# Altium PCB NC1-1B-BASIS.PcbDoc (part 1 of 4)
Units mm, origin at the board's own origin, x right, y up, seen from the top; angles counter-clockwise.
Board outline 78 x 78 mm, 4 copper layers (Top Layer, Mid 1 (GND), Mid 2 (PWR), Bottom Layer), stack 1.586 mm thick; 290 components, 134 nets, 819 pads, 380 vias.
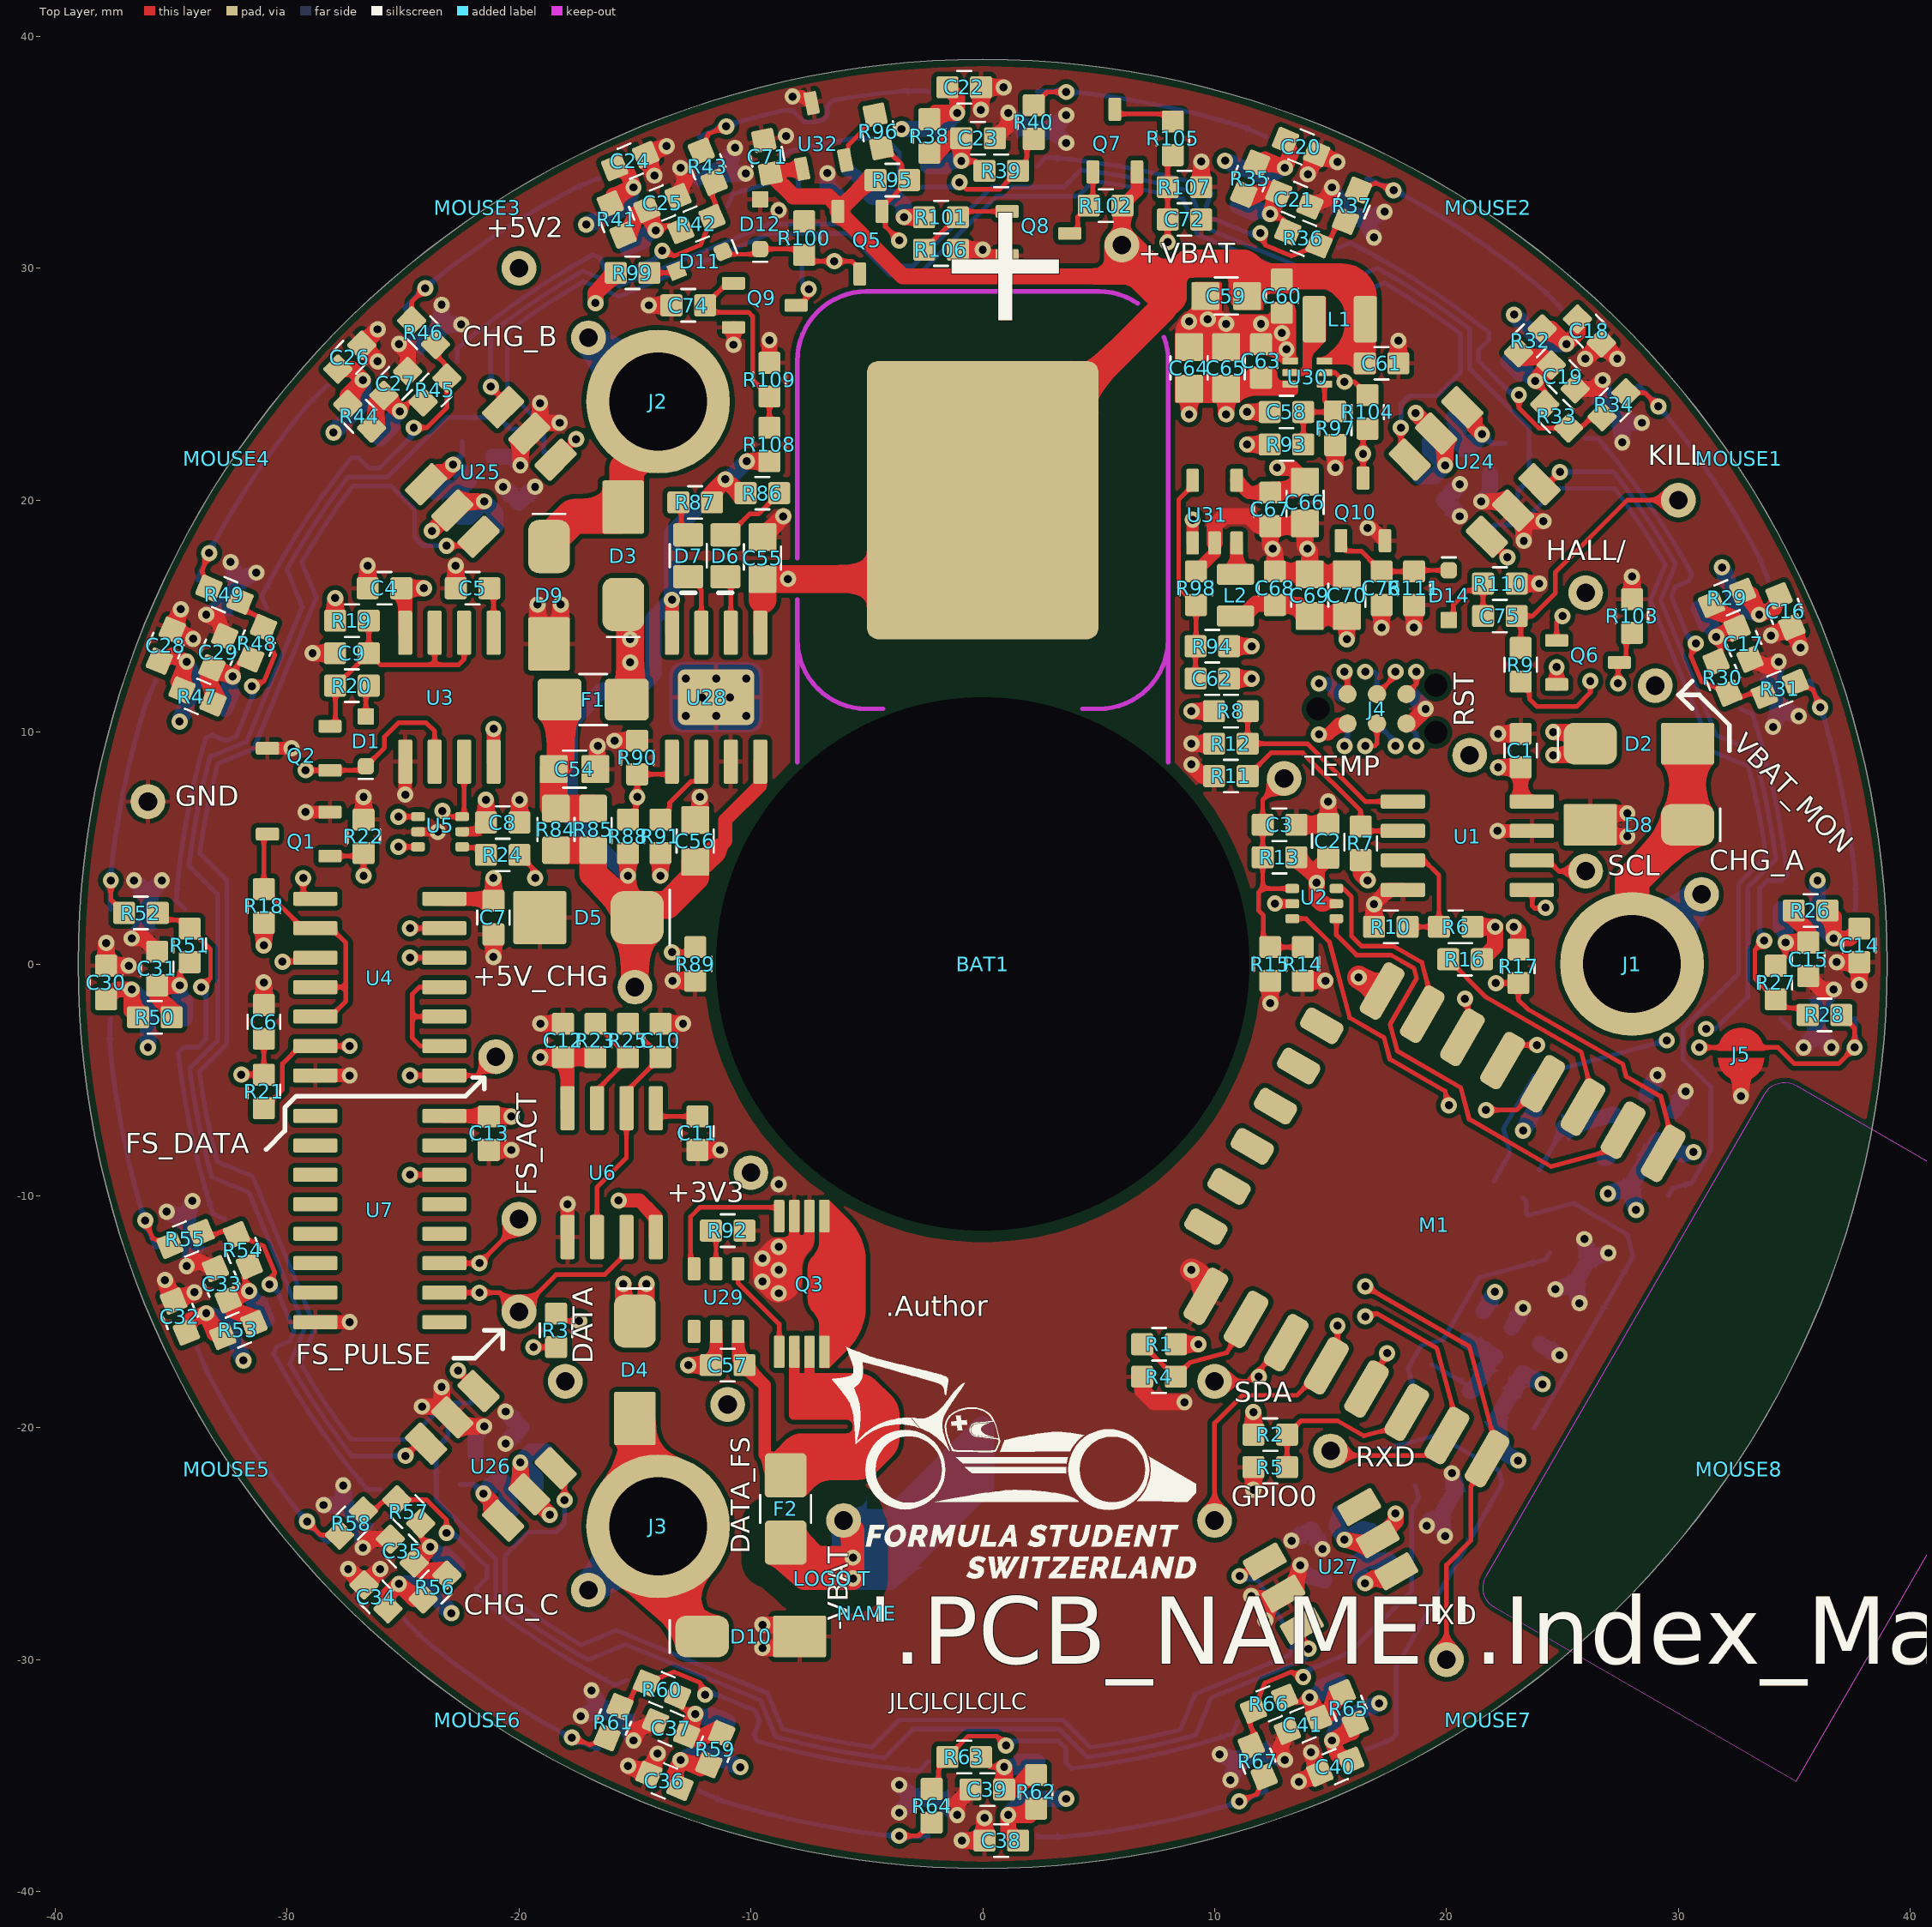
[diagram p0: Top Layer view]
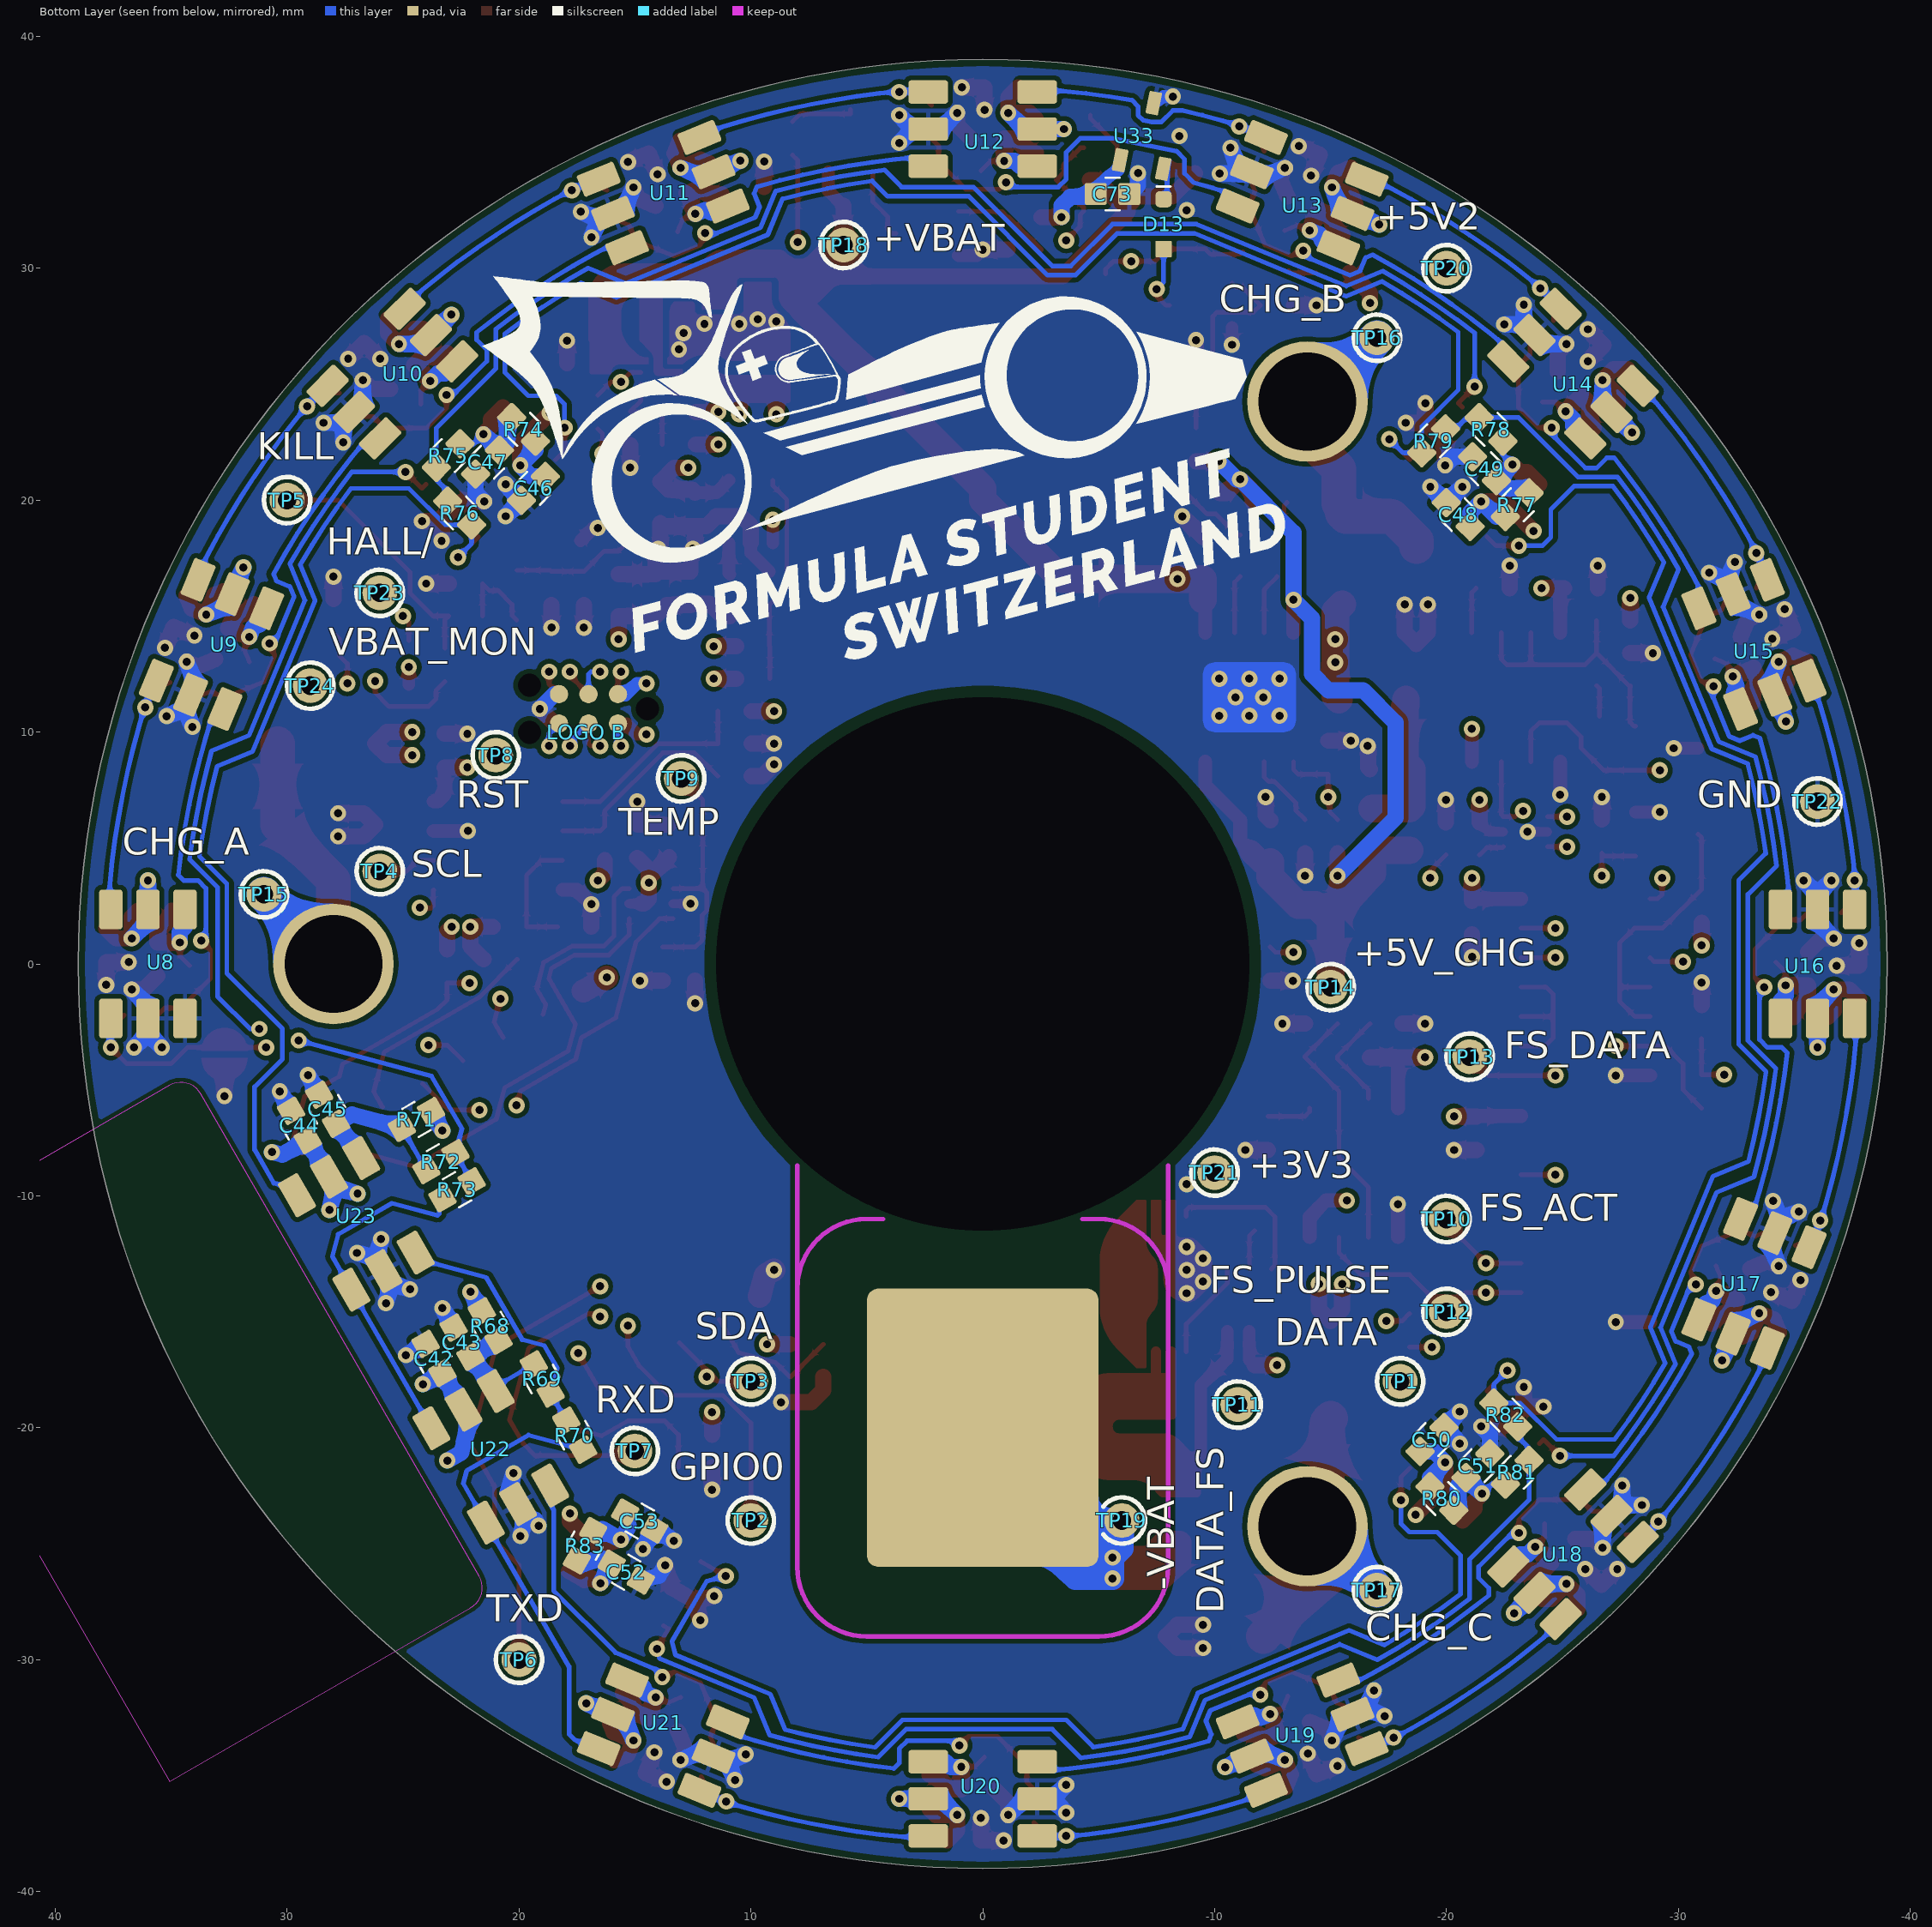
[diagram p1: Bottom Layer view, seen from below]
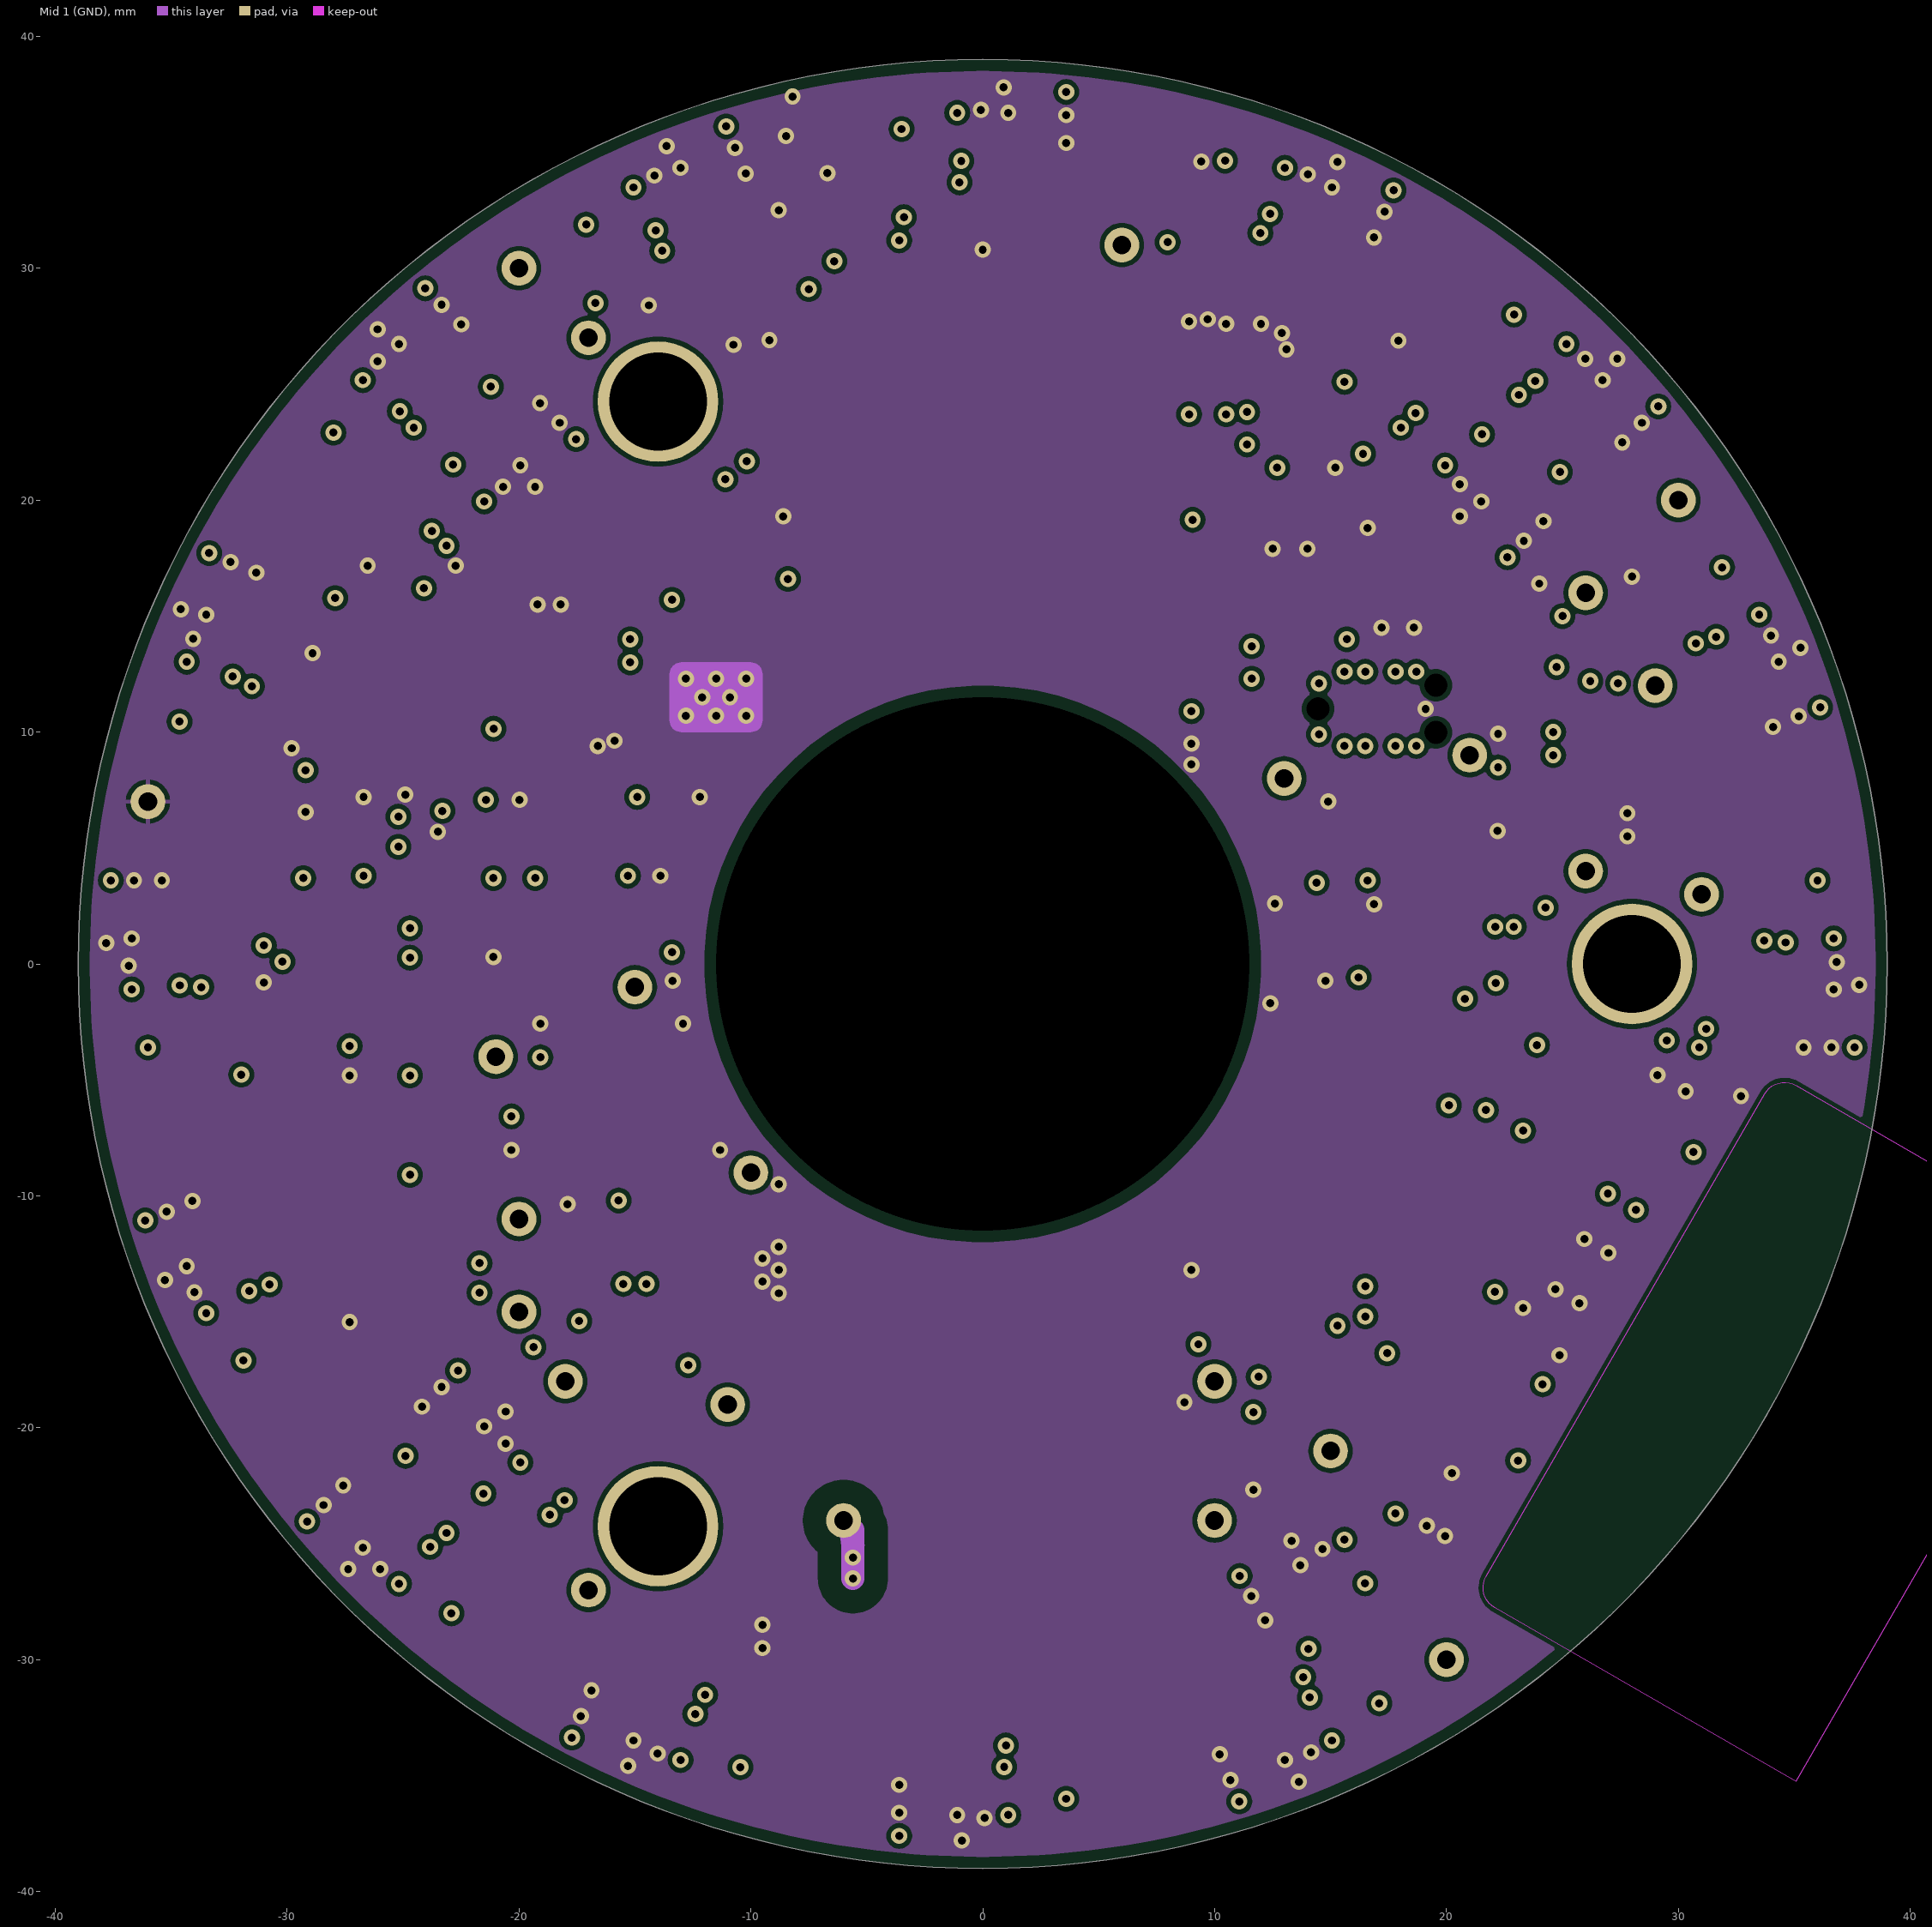
[diagram p2: Mid 1 (GND)]
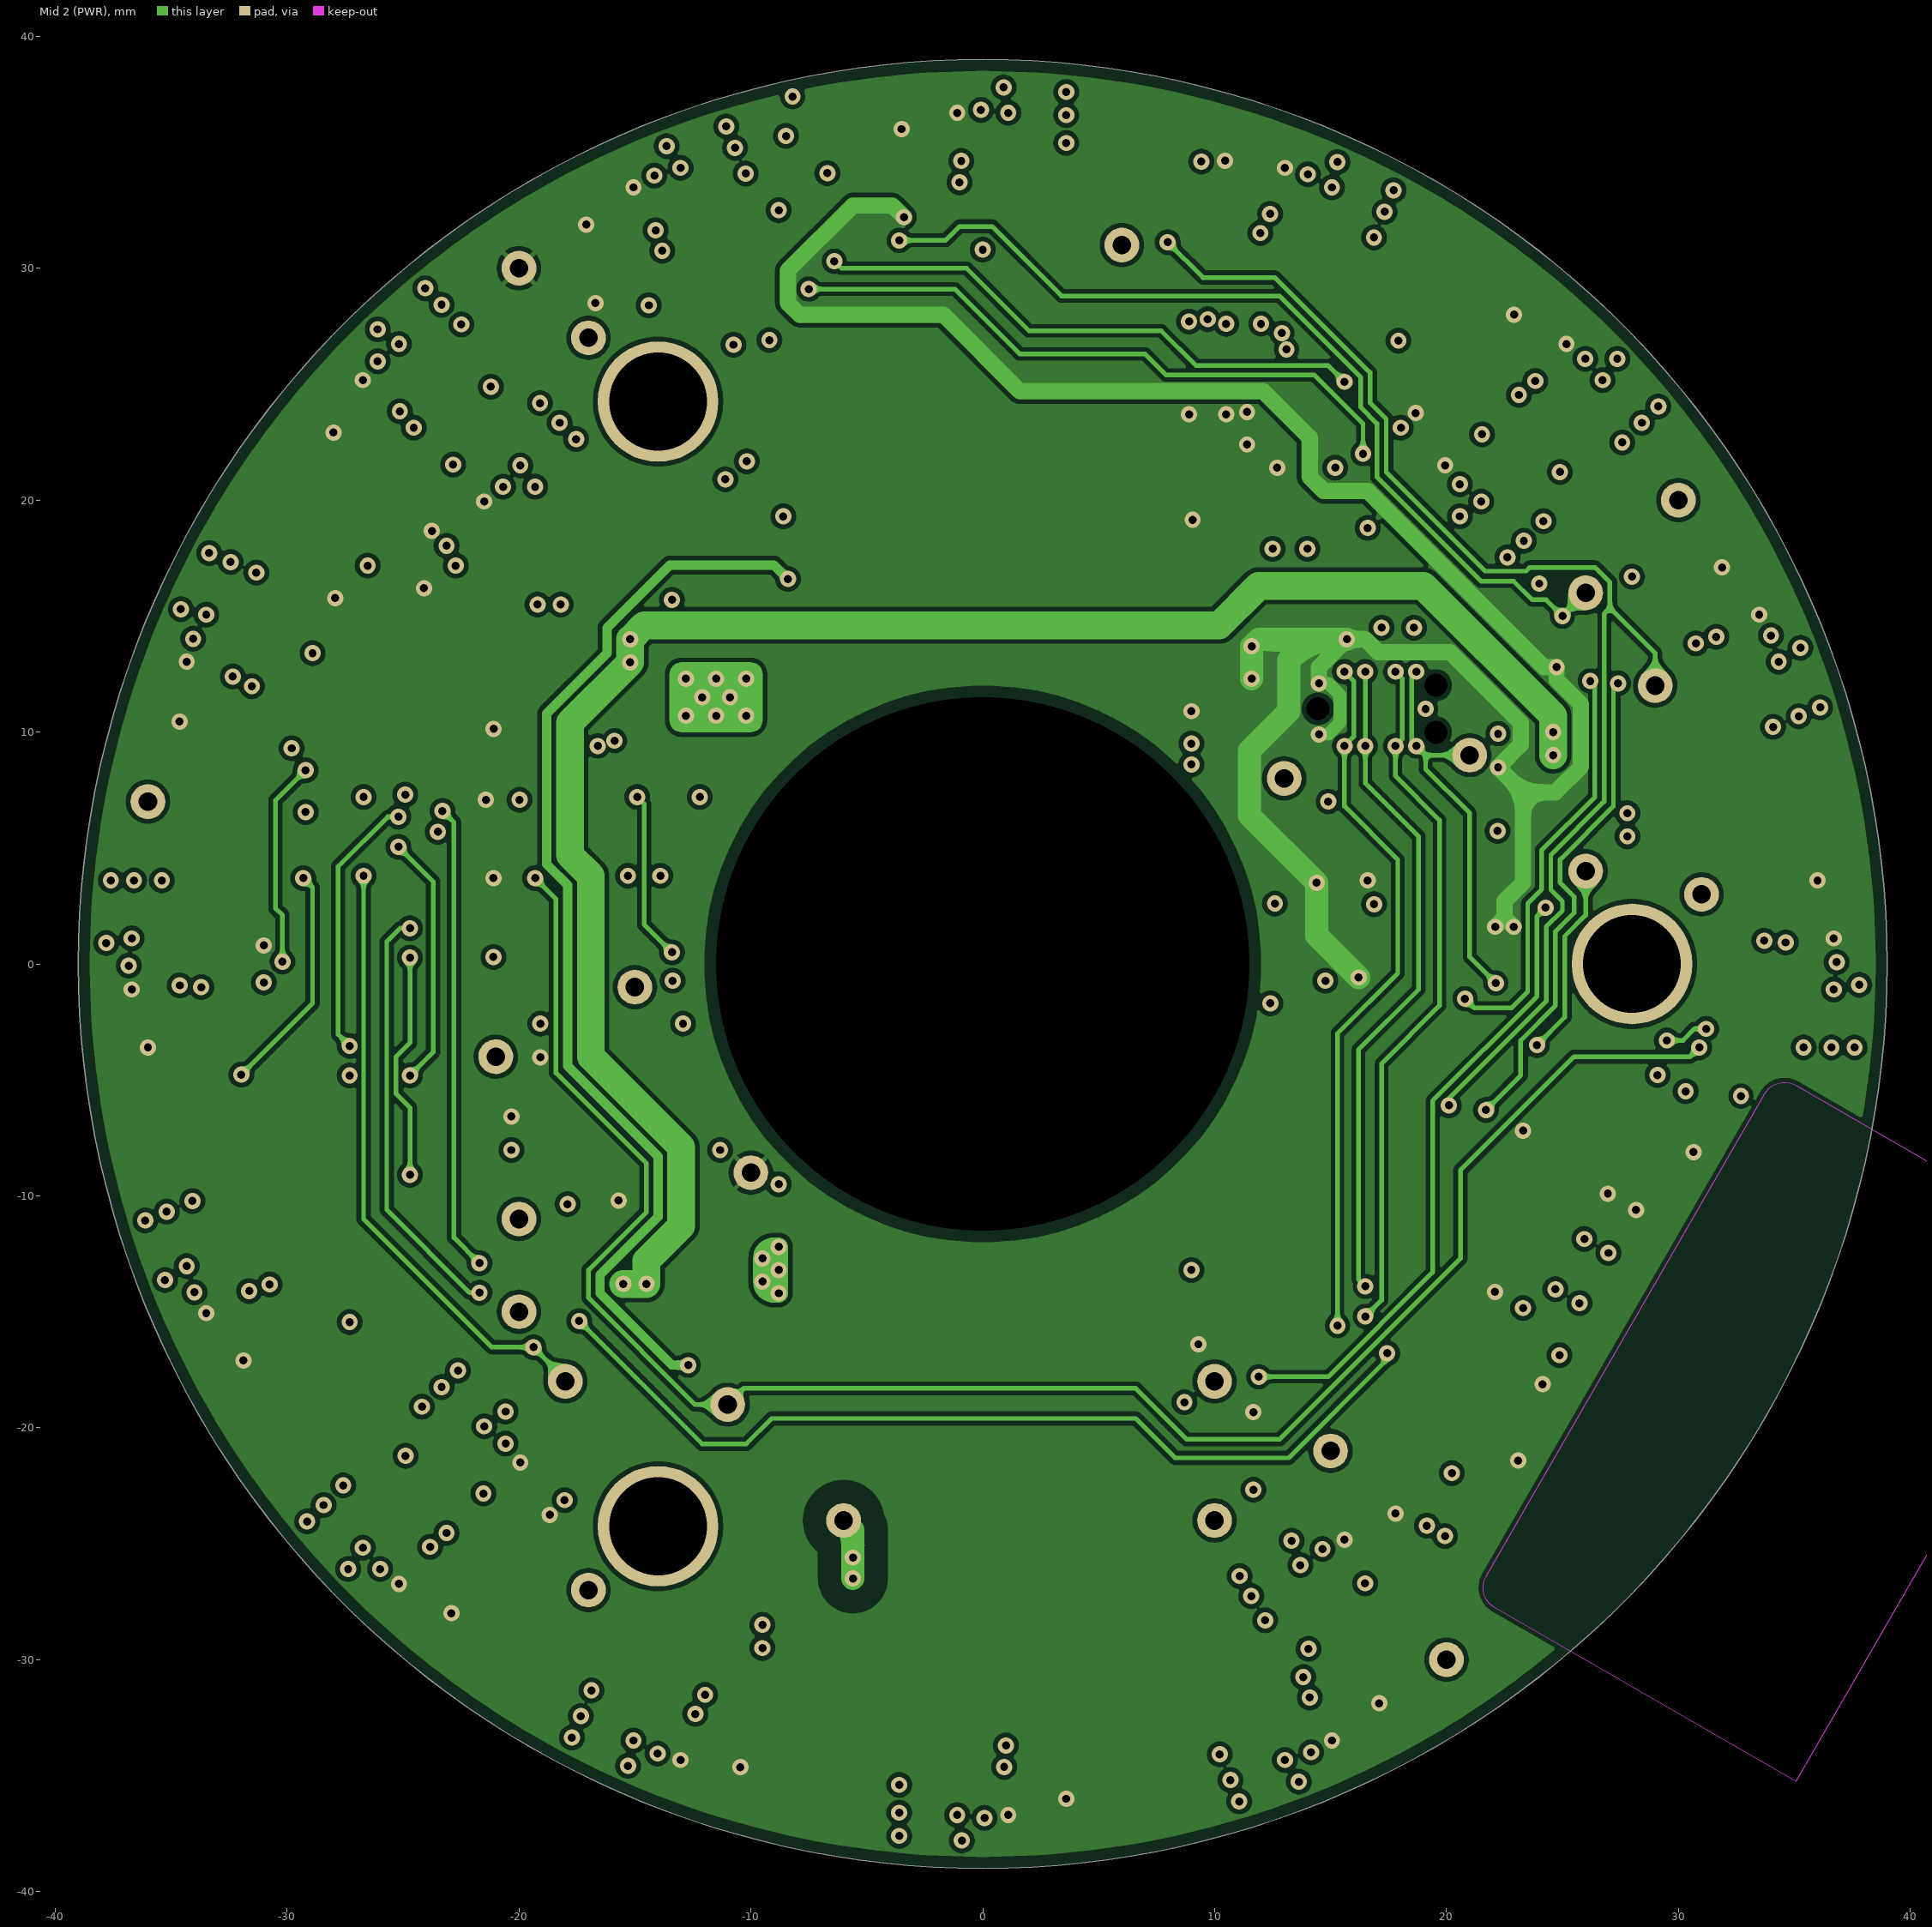
[diagram p3: Mid 2 (PWR)]
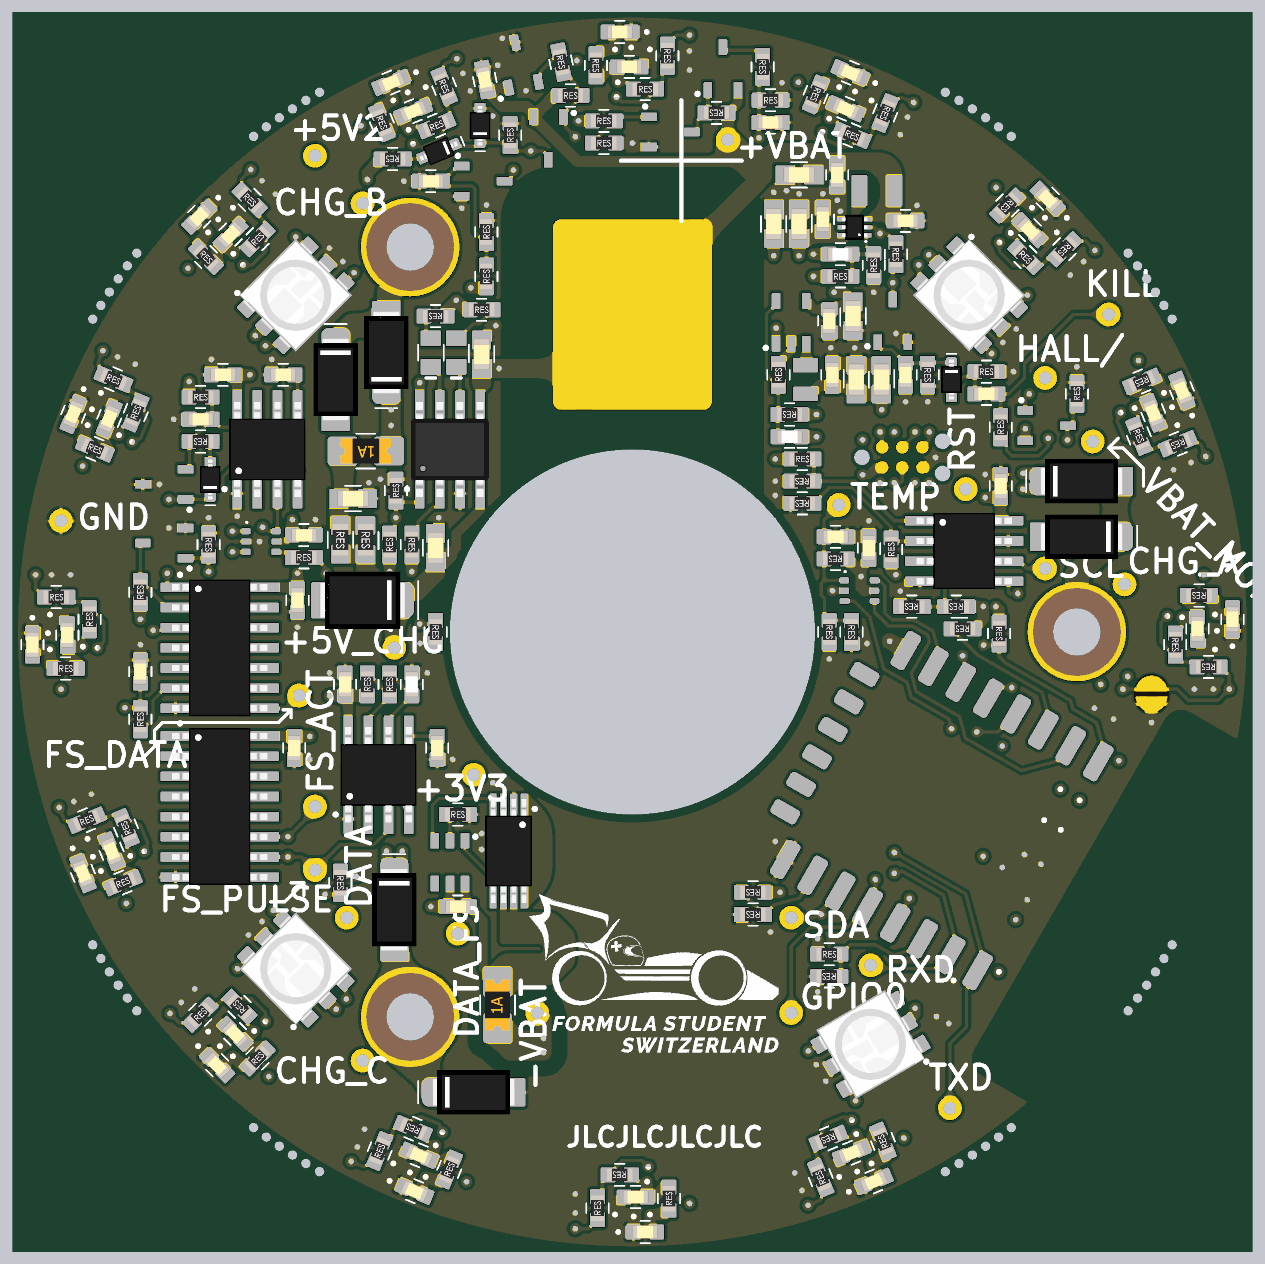
[diagram p6: 3D render of the assembled board from above, using the file's embedded part models]
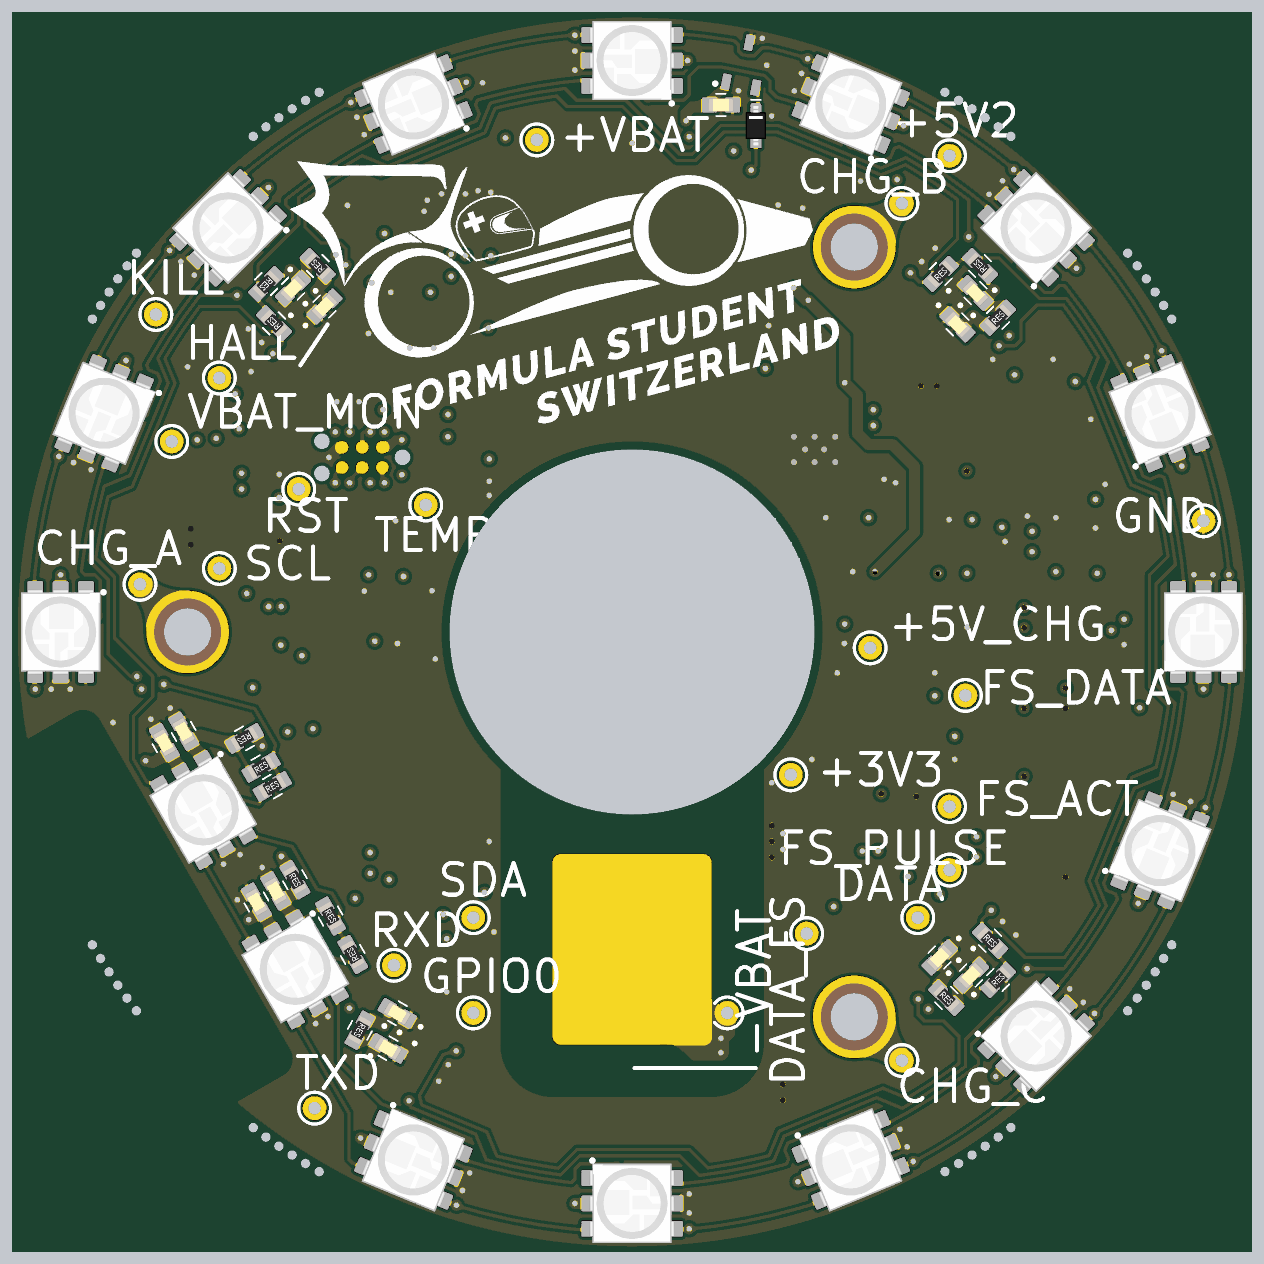
[diagram p7: 3D render of the assembled board from below, using the file's embedded part models]

## Layer stack, top to bottom
Top Solder: solder mask 0.0102, Solder Resist, Dk 3.5
Top Layer: signal copper 0.035
Dielectric 2: prepreg 0.2104, PP-006, Dk 4.1
Mid 1 (GND): signal copper 0.0152
Dielectric 1: dielectric 1.065, FR-4, Dk 4.8
Mid 2 (PWR): signal copper 0.0152
Dielectric 3: prepreg 0.2104, PP-006, Dk 4.1
Bottom Layer: signal copper 0.035
Bottom Solder: solder mask 0.0102, Solder Resist, Dk 3.5

## Board outline
0,-39 cw(c0,0) -39,0 cw(c0,0) 0,39 cw(c0,0) 39,0 cw(c0,0)

## Design rules (kind name [scope] priority, off if disabled: settings)
BoardOutlineClearance [not (InComponent('MOUSE*'))] p1 off: gap=0.3 ignorepadtopadclearanceinfootprint=FALSE except(0: Arc-SplitContinuation Track-SplitContinuation SMDPad-SplitContinuation THPad-SplitContinuation Via-SplitContinuation Fill-SplitContinuation Poly-SplitContinuation Region-SplitContinuation Text-SplitContinuation)
Clearance Clearance_-VBAT [InNet('-VBAT')] p1: gap=1 ignorepadtopadclearanceinfootprint=FALSE except(0: Arc-Hole Track-Hole SMDPad-Hole THPad-Hole Via-Hole Fill-Hole Poly-Hole Region-Hole Text-Hole)
Clearance [All] p2: gap=0.2 ignorepadtopadclearanceinfootprint=FALSE except(0: Arc-Hole Track-Hole SMDPad-Hole THPad-Hole Via-Hole Fill-Hole Poly-Hole Region-Hole Text-Hole; 0.15: Arc-Arc Arc-Track Arc-SMDPad Arc-THPad Arc-Via Arc-Text Track-Track Track-SMDPad Track-THPad Track-Via Track-Text SMDPad-SMDPad SMDPad-THPad SMDPad-Via SMDPad-Text THPad-THPad THPad-Via THPad-Text Via-Via Via-Text Text-Text)
ComponentClearance ComponentClearance_ESP-01S [All] p1: gap=0.254 collisioncheckmode=3 verticalgap=0.254 showdistances=FALSE
ComponentClearance ComponentClearance_Enclosure [isfree] p2: gap=0 collisioncheckmode=3 verticalgap=0 showdistances=FALSE
ComponentClearance [All] p3: gap=0.25 collisioncheckmode=3 verticalgap=0.25 showdistances=FALSE
Height [All] p1: minheight=0 maxheight=100 prefheight=12.7
HoleSize [All] p1: absolutevalues=TRUE maxlimit=27 minlimit=0.3 maxpercent=80.000 minpercent=20.000
HoleToHoleClearance [All] p1: gap=0.3 allowstackedmicrovias=TRUE
MinimumSolderMaskSliver [All] p1: minsoldermaskwidth=0.1
PolygonConnect [All] p1: thpad.connectstyle=Relief thpad.reliefconductorwidth=0.2 thpad.reliefentries=4 thpad.polygonreliefangle="90 Angle" thpad.airgapwidth=0.2 smdpad.connectstyle=Relief smdpad.reliefconductorwidth=0.2 smdpad.reliefentries=4 smdpad.polygonreliefangle="90 Angle" smdpad.airgapwidth=0.2 via.connectstyle=Direct via.reliefconductorwidth=0.254 via.reliefentries=4 via.polygonreliefangle="90 Angle" via.airgapwidth=0.254
RoomDefinition LED15 [InComponentClass('LED15')] p1: confinementstyle=ConfineIn formatcopy=FALSE lockcomponents=FALSE outline 19.819,-11.673 25.319,-2.147 33.113,-6.647 27.613,-16.173
RoomDefinition LED16 [InComponentClass('LED16')] p2: confinementstyle=ConfineIn formatcopy=FALSE lockcomponents=FALSE outline 20.506,26.163 16.263,21.92 21.92,16.263 26.163,20.506
RoomDefinition Lights [InComponentClass('Lights')] p3: confinementstyle=ConfineIn formatcopy=TRUE lockcomponents=FALSE outline 10.036,-25.383 13.036,-30.579 19.964,-26.579 16.964,-21.383
RoomDefinition LED0 [InComponentClass('LED0')] p4: confinementstyle=ConfineIn formatcopy=FALSE lockcomponents=FALSE outline 33,-4 33,4 39,4 39,-4
RoomDefinition LED6 [InComponentClass('LED6')] p5: confinementstyle=ConfineIn formatcopy=FALSE lockcomponents=FALSE outline -20.506,26.163 -26.163,20.506 -30.406,24.749 -24.749,30.406
RoomDefinition LED2 [InComponentClass('LED2')] p6: confinementstyle=ConfineIn formatcopy=FALSE lockcomponents=FALSE outline 26.163,20.506 20.506,26.163 24.749,30.406 30.406,24.749
RoomDefinition LED12 [InComponentClass('LED12')] p7: confinementstyle=ConfineIn formatcopy=FALSE lockcomponents=FALSE outline -4,-33 4,-33 4,-39 -4,-39
RoomDefinition LED17 [InComponentClass('LED17')] p8: confinementstyle=ConfineIn formatcopy=FALSE lockcomponents=FALSE outline -26.163,20.506 -21.92,16.263 -16.263,21.92 -20.506,26.163
RoomDefinition LED18 [InComponentClass('LED18')] p9: confinementstyle=ConfineIn formatcopy=FALSE lockcomponents=FALSE outline -20.506,-26.163 -16.263,-21.92 -21.92,-16.263 -26.163,-20.506
RoomDefinition LED14 [InComponentClass('LED14')] p10: confinementstyle=ConfineIn formatcopy=FALSE lockcomponents=FALSE outline 14.885,-22.219 20.385,-12.693 27.313,-16.693 21.813,-26.219
RoomDefinition LED1 [InComponentClass('LED1')] p11: confinementstyle=ConfineIn formatcopy=FALSE lockcomponents=FALSE outline 32.019,8.933 28.957,16.324 34.501,18.62 37.562,11.229
RoomDefinition LED3 [InComponentClass('LED3')] p12: confinementstyle=ConfineIn formatcopy=FALSE lockcomponents=FALSE outline 16.324,28.957 8.933,32.019 11.229,37.562 18.62,34.501
RoomDefinition LED13 [InComponentClass('LED13')] p13: confinementstyle=ConfineIn formatcopy=FALSE lockcomponents=FALSE outline 8.933,-32.019 16.324,-28.957 18.62,-34.501 11.229,-37.562
RoomDefinition LED10 [InComponentClass('LED10')] p14: confinementstyle=ConfineIn formatcopy=FALSE lockcomponents=FALSE outline -26.163,-20.506 -20.506,-26.163 -24.749,-30.406 -30.406,-24.749
RoomDefinition LED11 [InComponentClass('LED11')] p15: confinementstyle=ConfineIn formatcopy=FALSE lockcomponents=FALSE outline -16.324,-28.957 -8.933,-32.019 -11.229,-37.562 -18.62,-34.501
RoomDefinition LED9 [InComponentClass('LED9')] p16: confinementstyle=ConfineIn formatcopy=FALSE lockcomponents=FALSE outline -32.019,-8.933 -28.957,-16.324 -34.501,-18.62 -37.562,-11.229
RoomDefinition LED7 [InComponentClass('LED7')] p17: confinementstyle=ConfineIn formatcopy=FALSE lockcomponents=FALSE outline -28.957,16.324 -32.019,8.933 -37.562,11.229 -34.501,18.62
RoomDefinition LED8 [InComponentClass('LED8')] p18: confinementstyle=ConfineIn formatcopy=FALSE lockcomponents=FALSE outline -33,4 -33,-4 -39,-4 -39,4
RoomDefinition LED4 [InComponentClass('LED4')] p19: confinementstyle=ConfineIn formatcopy=FALSE lockcomponents=FALSE outline 4,33 -4,33 -4,39 4,39
RoomDefinition LED5 [InComponentClass('LED5')] p20: confinementstyle=ConfineIn formatcopy=FALSE lockcomponents=FALSE outline -8.933,32.019 -16.324,28.957 -18.62,34.501 -11.229,37.562
RoutingVias [All] p1: holewidth=0.35 width=0.7 viastyle="Through Hole" minholewidth=0.35 minwidth=0.7 maxholewidth=5 maxwidth=6
SilkToSilkClearance [All] p1: silktosilkclearance=0.1
SilkToSolderMaskClearance [IsPad] p1: minsilkscreentomaskgap=0.1 clearancetoexposedcopper=TRUE
SolderMaskExpansion "SolderMaskExpansion Via" [IsVia] p1: expansion=0.1 istentingtop=TRUE
SolderMaskExpansion [All] p2: expansion=0.05 istentingtop=FALSE
UnRoutedNet [All] p1: checkbadconnections=TRUE
Width [All] p1: maxlimit=5 minlimit=0.15 preferedwidth=0.2 minimp=50.000000 maximp=50.000000 favimp=50.000000
22 further rules are at their usual default settings.

## Classes and differential pairs
component class LED18: C50 C51 R80 R81 R82 U26
component class LED17: C48 C49 R77 R78 R79 U25
component class LED12: C38 C39 R62 R63 R64 U20
component class LED8: C30 C31 R50 R51 R52 U16
component class LED15: C44 C45 R71 R72 R73 U23
component class LED14: C42 C43 R68 R69 R70 U22
component class LED16: C46 C47 R74 R75 R76 U24
component class LED6: C26 C27 R44 R45 R46 U14
channel class LED: LED0 LED1 LED2 LED3 LED4 LED5 LED6 LED7 LED8 LED9 LED10 LED11 LED12 LED13 LED14 LED15 LED16 LED17 LED18
component class Lights: C52 C53 R83 U27
component class LED0: C14 C15 R26 R27 R28 U8
component class Power: C C58 C59 C60 C61 C62 C63 C64 C65 C66 C67 C68 C69 C70 C71 C72 C73 C74 C75 C76 D11 D12 D13 D14 L1 L2 Q5 Q6 Q7 Q8 Q9 Q10 R93 R94 R95 R96 R97 R98 R99 R100 R101 R102 R103 R104 R105 R106 R107 R108 R109 R110 R111 TP20 TP21 TP22 TP23 TP24 U30 U31 U32 U33
component class LED11: C36 C37 R59 R60 R61 U19
component class LED7: C28 C29 R47 R48 R49 U15
component class LED5: C24 C25 R41 R42 R43 U13
component class LED13: C40 C41 R65 R66 R67 U21
component class LED10: C34 C35 R56 R57 R58 U18
component class LED9: C32 C33 R53 R54 R55 U17
component class LED4: C22 C23 R38 R39 R40 U12
component class LED3: C20 C21 R35 R36 R37 U11
component class LED2: C18 C19 R32 R33 R34 U10
component class LED1: C16 C17 R29 R30 R31 U9
component class FailSafe: C4 C5 C6 C7 C8 C9 C10 C11 C12 C13 D1 J5 Q1 Q2 R18 R19 R20 R21 R22 R23 R24 R25 TP10 TP11 TP12 TP13 U3 U4 U5 U6 U7
component class Control: C1 C2 C3 J4 M1 R1 R2 R3 R4 R5 R6 R7 R8 R9 R10 R11 R12 R13 R14 R15 R16 R17 TP1 TP2 TP3 TP4 TP5 TP6 TP7 TP8 TP9 U1 U2
component class Charger: BAT1 C54 C55 C56 C57 D2 D3 D4 D5 D6 D7 D8 D9 D10 F1 F2 Q3 R84 R85 R86 R87 R88 R89 R90 R91 R92 TP14 TP15 TP16 TP17 TP18 TP19 U28 U29
component class NC1-1-Top: J1 J2 J3

## Components (designator, comment, footprint, x,y, rotation, side; value= is the part's Value field where it differs from the comment)
BAT1 "BAT_21700_NightCone" BAT-21700-NC 0,0 r90 top locked
C1 "1.0U/0603/50V/X5R" CAP0603_X7R 23.2,9.2 r90 top value=1.0uF
C2 "1.0U/0603/50V/X5R" CAP0603_X7R 14.9,5.3 r90 top value=1.0uF
C3 "1.0U/0603/50V/X5R" CAP0603_X7R 12.8,6 r0 top value=1.0uF
C4 "1U/0603/50V/X5R" CAP0603_X7R -25.8,16.2 r180 top value=1.0uF
C5 "1U/0603/50V/X5R" CAP0603_X7R -22,16.2 r180 top value=1.0uF
C6 "1U/0603/50V/X5R" CAP0603_X7R -31,-2.5 r90 top value=1.0uF
C7 "1U/0603/50V/X5R" CAP0603_X7R -21.1,2 r270 top value=1.0uF
C8 "1U/0603/50V/X5R" CAP0603_X7R -20.7,6.1 r0 top value=1.0uF
C9 "1U/0603/50V/X5R" CAP0603_X7R -27.2,13.4 r180 top value=1.0uF
C10 "470P/0603/50V/C0G" CAP0603_C0G -13.9,-3.3 r90 top value=470pF
C11 "1U/0603/50V/X5R" CAP0603_X7R -12.3,-7.3 r270 top value=1.0uF
C12 "1U/0603/50V/X5R" CAP0603_X7R -18.1,-3.3 r90 top value=1.0uF
C13 "1U/0603/50V/X5R" CAP0603_X7R -21.3,-7.3 r270 top value=1.0uF
C14 "1U/0603/50V/X5R" CAP0603_X7R 37.8,0.8 r270 top value=1.0uF
C15 "1U/0603/50V/X5R" CAP0603_X7R 35.6,0.2 r270 top value=1.0uF
C16 "1U/0603/50V/X5R" CAP0603_X7R 34.616,15.205 r292.5 top value=1.0uF (schematic designator C14)
C17 "1U/0603/50V/X5R" CAP0603_X7R 32.814,13.808 r292.5 top value=1.0uF (schematic designator C15)
C18 "1U/0603/50V/X5R" CAP0603_X7R 26.163,27.294 r315 top value=1.0uF (schematic designator C14)
C19 "1U/0603/50V/X5R" CAP0603_X7R 25.032,25.314 r315 top value=1.0uF (schematic designator C15)
C20 "1U/0603/50V/X5R" CAP0603_X7R 13.726,35.229 r337.5 top value=1.0uF (schematic designator C14)
C21 "1U/0603/50V/X5R" CAP0603_X7R 13.439,32.967 r337.5 top value=1.0uF (schematic designator C15)
C22 "1U/0603/50V/X5R" CAP0603_X7R -0.8,37.8 r0 top value=1.0uF (schematic designator C14)
C23 "1U/0603/50V/X5R" CAP0603_X7R -0.2,35.6 r0 top value=1.0uF (schematic designator C15)
C24 "1U/0603/50V/X5R" CAP0603_X7R -15.205,34.617 r22.5 top value=1.0uF (schematic designator C14)
C25 "1U/0603/50V/X5R" CAP0603_X7R -13.808,32.814 r22.5 top value=1.0uF (schematic designator C15)
C26 "1U/0603/50V/X5R" CAP0603_X7R -27.294,26.163 r45 top value=1.0uF (schematic designator C14)
C27 "1U/0603/50V/X5R" CAP0603_X7R -25.314,25.032 r45 top value=1.0uF (schematic designator C15)
C28 "1U/0603/50V/X5R" CAP0603_X7R -35.229,13.726 r67.5 top value=1.0uF (schematic designator C14)
C29 "1U/0603/50V/X5R" CAP0603_X7R -32.967,13.439 r67.5 top value=1.0uF (schematic designator C15)
C30 "1U/0603/50V/X5R" CAP0603_X7R -37.8,-0.8 r90 top value=1.0uF (schematic designator C14)
C31 "1U/0603/50V/X5R" CAP0603_X7R -35.6,-0.2 r90 top value=1.0uF (schematic designator C15)
C32 "1U/0603/50V/X5R" CAP0603_X7R -34.617,-15.205 r112.5 top value=1.0uF (schematic designator C14)
C33 "1U/0603/50V/X5R" CAP0603_X7R -32.814,-13.808 r112.5 top value=1.0uF (schematic designator C15)
C34 "1U/0603/50V/X5R" CAP0603_X7R -26.163,-27.294 r135 top value=1.0uF (schematic designator C14)
C35 "1U/0603/50V/X5R" CAP0603_X7R -25.032,-25.314 r135 top value=1.0uF (schematic designator C15)
C36 "1U/0603/50V/X5R" CAP0603_X7R -13.726,-35.229 r157.5 top value=1.0uF (schematic designator C14)
C37 "1U/0603/50V/X5R" CAP0603_X7R -13.439,-32.967 r157.5 top value=1.0uF (schematic designator C15)
C38 "1U/0603/50V/X5R" CAP0603_X7R 0.8,-37.8 r180 top value=1.0uF (schematic designator C14)
C39 "1U/0603/50V/X5R" CAP0603_X7R 0.2,-35.6 r180 top value=1.0uF (schematic designator C15)
C40 "1U/0603/50V/X5R" CAP0603_X7R 15.205,-34.617 r202.5 top value=1.0uF (schematic designator C14)
C41 "1U/0603/50V/X5R" CAP0603_X7R 13.808,-32.814 r202.5 top value=1.0uF (schematic designator C15)
C42 "1U/0603/50V/X5R" CAP0603_X7R 23.665,-17.011 r60 bottom value=1.0uF (schematic designator C14)
C43 "1U/0603/50V/X5R" CAP0603_X7R 22.452,-16.311 r60 bottom value=1.0uF (schematic designator C15)
C44 "1U/0603/50V/X5R" CAP0603_X7R 29.465,-6.966 r60 bottom value=1.0uF (schematic designator C14)
C45 "1U/0603/50V/X5R" CAP0603_X7R 28.252,-6.266 r60 bottom value=1.0uF (schematic designator C15)
C46 "1U/0603/50V/X5R" CAP0603_X7R 19.375,20.506 r315 bottom value=1.0uF (schematic designator C14)
C47 "1U/0603/50V/X5R" CAP0603_X7R 21.355,21.637 r315 bottom value=1.0uF (schematic designator C15)
C48 "1U/0603/50V/X5R" CAP0603_X7R -20.506,19.375 r45 bottom value=1.0uF (schematic designator C14)
C49 "1U/0603/50V/X5R" CAP0603_X7R -21.637,21.355 r45 bottom value=1.0uF (schematic designator C15)
C50 "1U/0603/50V/X5R" CAP0603_X7R -19.375,-20.506 r135 bottom value=1.0uF (schematic designator C14)
C51 "1U/0603/50V/X5R" CAP0603_X7R -21.355,-21.637 r135 bottom value=1.0uF (schematic designator C15)
C52 "1.0U/0603/50V/X5R" CAP0603_X7R 15.373,-26.227 r210 bottom value=1.0uF (schematic designator C16)
C53 "1.0U/0603/50V/X5R" CAP0603_X7R 14.793,-24.022 r210 bottom value=1.0uF (schematic designator C17)
C54 "22U/0805/25V/X5R" CAP0805_X7R -17.6,8.4 r0 top value=22uF (schematic designator C18)
C55 "22U/0805/25V/X5R" CAP0805_X7R -9.5,17.5 r90 top value=22uF (schematic designator C19)
C56 "22U/0805/25V/X5R" CAP0805_X7R -12.4,5.3 r90 top value=22uF (schematic designator C20)
C57 "100N/0603/50V/X7R" CAP0603_X7R -11,-17.3 r0 top value=100nF (schematic designator C21)
C58 "1.0N/0603/50V/C0G" CAP0603_C0G 13.1,23.8 r0 top value=1.0nF (schematic designator C22)
C59 "22U/0805/25V/X5R" CAP0805_X7R 10.5,28.8 r180 top value=22uF (schematic designator C23)
C60 "1.0U/0603/50V/X5R" CAP0603_X7R 12.9,28.8 r90 top value=1.0uF (schematic designator C24)
C61 "1U/0603/50V/X5R" CAP0603_X7R 17.2,25.9 r180 top value=1.0uF (schematic designator C25)
C62 "1.0N/0603/50V/C0G" CAP0603_C0G 9.9,12.3 r180 top value=1.0nF (schematic designator C26)
C63 "1U/0603/50V/X5R" CAP0603_X7R 12,26 r270 top value=1.0uF (schematic designator C27)
C64 "22U/0805/25V/X5R" CAP0805_X7R 8.9,25.7 r90 top value=22uF (schematic designator C28)
C65 "22U/0805/25V/X5R" CAP0805_X7R 10.5,25.7 r90 top value=22uF (schematic designator C29)
C66 "22U/0805/25V/X5R" CAP0805_X7R 13.9,19.9 r270 top value=22uF (schematic designator C30)
C67 "1U/0603/50V/X5R" CAP0603_X7R 12.4,19.6 r90 top value=1.0uF (schematic designator C31)
C68 "1U/0603/50V/X5R" CAP0603_X7R 12.6,16.2 r270 top value=1.0uF (schematic designator C32)
C69 "22U/0805/25V/X5R" CAP0805_X7R 14.1,15.9 r90 top value=22uF (schematic designator C33)
C70 "22U/0805/25V/X5R" CAP0805_X7R 15.7,15.9 r90 top value=22uF (schematic designator C34)
C71 "1U/0603/50V/X5R" CAP0603_X7R -9.3,34.8 r101.25 top value=1.0uF (schematic designator C35)
C72 "1.0U/0603/50V/X5R" CAP0603_X7R 8.7,32.1 r0 top value=1.0uF (schematic designator C36)
C73 "1.0U/0603/50V/X5R" CAP0603_X7R -5.6,33.2 r180 bottom value=1.0uF (schematic designator C37)
C74 "1U/0603/50V/X5R" CAP0603_X7R -12.7,28.4 r180 top value=1.0uF (schematic designator C38)
C75 "100N/0603/50V/X7R" CAP0603_X7R 22.3,15 r180 top value=100nF (schematic designator C39)
C76 "1U/0603/50V/X5R" CAP0603_X7R 17.2,16.2 r270 top value=1.0uF (schematic designator C40)
D1 "1N5819WS" SOD2513X100 -26.6,9.6 r90 top
D2 "SS34" DIOM5226X230 28.3,9.5 r0 top
D3 "SS34" DIOM5226X230 -15.5,17.6 r90 top
D4 "SS34" DIOM5226X230 -15,-17.5 r270 top
D5 "P6SMB6.8CA" DIOM5436X265 -17,2 r180 top
D6 "LED Green" LED0805_GREEN -11.1,17.6 r90 top value=Green
D7 "LED Red" LED0805_RED -12.7,17.6 r90 top value=Red
D8 "SS34" DIOM5226X230 28.3,6 r180 top
D9 "SS34" DIOM5226X230 -18.7,15.9 r270 top
D10 "SS34" DIOM5226X230 -10,-29 r0 top
D11 "1N5819WS" SOD2513X100 -12.2,30.3 r202.5 top
D12 "1N5819WS" SOD2513X100 -9.6,31.9 r90 top
D13 "1N5819WS" SOD2513X100 -7.8,31.9 r270 bottom
D14 "1N5819WS" SOD2513X100 20.1,15.9 r270 top
F1 "1.5A/1206/Fuse" Fuse1206-0.55-WW -16.8,11.4 r180 top value=1.5A
F2 "1.5A/1206/Fuse" Fuse1206-0.55-WW -8.5,-23.5 r90 top value=1.5A
J1 "PEM M3, 2mm" MECH_SMTSO3020CTJ 28,0 r270 top
J2 "PEM M3, 2mm" MECH_SMTSO3020CTJ -14,24.249 r330 top
J3 "PEM M3, 2mm" MECH_SMTSO3020CTJ -14,-24.249 r210 top
J4 "TAG-CON-6-NL-DUAL" TC2030-NL-2 17,11 r0 top
J5 "Solder Jumper 2pin 0.3mm" Solder_Jumper_2pin_0.3mm 32.7,-3.9 r270 top
L1 "1UH/2520" INDM2520X10 15.4,27.8 r180 top value=1UH
L2 "2.2UH/2016" INDM2016X10 10.9,15.9 r270 top value=2.2UH
"LOGO B" "Comment" FSCH-LOGO-20MM 17.1,10 r165 bottom
"LOGO T" "Comment" FSCH-LOGO-10MM -6.5,-26.5 r0 top
M1 "ESP-12F" ESP-12F 27.713,-16 r150 top
MOUSE1 "Comment" MOUSE-R39-CLEAR 32.427,21.667 r123.75 top
MOUSE2 "Comment" MOUSE-R39-CLEAR 21.667,32.427 r146.25 top
MOUSE3 "Comment" MOUSE-R39-CLEAR -21.667,32.427 r213.75 top
MOUSE4 "Comment" MOUSE-R39-CLEAR -32.427,21.667 r236.25 top
MOUSE5 "Comment" MOUSE-R39-CLEAR -32.427,-21.667 r303.75 top
MOUSE6 "Comment" MOUSE-R39-CLEAR -21.667,-32.427 r326.25 top
MOUSE7 "Comment" MOUSE-R39-CLEAR 21.667,-32.427 r33.75 top
MOUSE8 "Comment" MOUSE-R39-CLEAR 32.427,-21.667 r56.25 top
NAME "Comment" PCB-NAME -5,-28 r0 top
Q1 "AO3400A" SOT2395P280X125-3-SE#1 -29.5,5.6 r0 top
Q2 "MMBT4403L" SOT2395P280X125-3-SE#1 -29.5,9.3 r0 top
Q3 "WSP8814" SOP065P650X110-8-NW -7.8,-13.8 r270 top
Q5 "BSS84" SOT2395P280X125-3-SE#1 -5.3,31.1 r90 top
Q6 "BSS84" SOT2395P280X125-3-SE#1 26.1,13 r180 top
Q7 "BSS84" SOT2395P280X125-3-SE#1 5.7,35.5 r270 top
Q8 "AO3400A" SOT2395P280X125-3-SE#1 2.4,31.5 r180 top
Q9 "AO3400A" SOT2395P280X125-3-SE#1 -9.4,28.4 r180 top
Q10 "AO3400A" SOT2395P280X125-3-SE#1 16.4,19.6 r270 top
R1 "1K5/0603" R0603-0.40-WW 7.6,-16.4 r180 top value=1K5
R2 "1K5/0603" R0603-0.40-WW 12.4,-20.3 r0 top value=1K5
R3 "270R/0603" R0603-0.40-WW -18.4,-15.8 r270 top value=270R
R4 "1K5/0603" R0603-0.40-WW 7.6,-17.8 r180 top value=1K5
R5 "1K5/0603" R0603-0.40-WW 12.4,-21.7 r180 top value=1K5
R6 "1K5/0603" R0603-0.40-WW 20.4,1.6 r180 top value=1K5
R7 "1K5/0603" R0603-0.40-WW 16.3,5.2 r90 top value=1K5
R8 "1K5/0603" R0603-0.40-WW 10.7,10.9 r0 top value=1K5
R9 "270R/0603" R0603-0.40-WW 23.2,12.9 r90 top value=270R
R10 "1K5/0603" R0603-0.40-WW 17.6,1.6 r180 top value=1K5
R11 "1K5/0603" R0603-0.40-WW 10.7,8.1 r180 top value=1K5
R12 "1K5/0603" R0603-0.40-WW 10.7,9.5 r180 top value=1K5
R13 "22K/0603" R0603-0.40-WW 12.8,4.6 r180 top value=22K
R14 "12K/0603" R0603-0.40-WW 13.8,0 r270 top value=12K
R15 "10K/0603/NTC/3380K" R0603-0.40-WW 12.4,0 r270 top value=10K
R16 "1K5/0603" R0603-0.40-WW 20.8,0.2 r180 top value=1K5
R17 "1K5/0603" R0603-0.40-WW 23.1,-0.1 r270 top value=1K5
R18 "1K5/0603" R0603-0.40-WW -31,2.5 r90 top value=1K5
R19 "100K/0603" R0603-0.40-WW -27.2,14.8 r0 top value=100K
R20 "20R/0603" R0603-0.40-WW -27.2,12 r180 top value=20R
R21 "100K/0603" R0603-0.40-WW -31,-5.5 r90 top value=100K
R22 "100K/0603" R0603-0.40-WW -26.7,5.5 r270 top value=100K
R23 "1K5/0603" R0603-0.40-WW -16.7,-3.3 r90 top value=1K5
R24 "270R/0603" R0603-0.40-WW -20.7,4.7 r0 top value=270R
R25 "270R/0603" R0603-0.40-WW -15.3,-3.3 r90 top value=270R
R26 "270R/0603" R0603-0.40-WW 35.7,2.3 r180 top value=270R
R27 "0R/0603" R0603-0.40-WW 34.2,-0.8 r270 top value=0R
R28 "0R/0603" R0603-0.40-WW 36.3,-2.2 r180 top value=0R
R29 "270R/0603" R0603-0.40-WW 32.102,15.787 r202.5 top value=270R (schematic designator R26)
R30 "0R/0603" R0603-0.40-WW 31.903,12.349 r292.5 top value=0R (schematic designator R27)
R31 "0R/0603" R0603-0.40-WW 34.379,11.859 r202.5 top value=0R (schematic designator R28)
R32 "270R/0603" R0603-0.40-WW 23.617,26.87 r225 top value=270R (schematic designator R26)
R33 "0R/0603" R0603-0.40-WW 24.749,23.617 r315 top value=0R (schematic designator R27)
R34 "0R/0603" R0603-0.40-WW 27.224,24.112 r225 top value=0R (schematic designator R28)
R35 "270R/0603" R0603-0.40-WW 11.537,33.863 r247.5 top value=270R (schematic designator R26)
R36 "0R/0603" R0603-0.40-WW 13.827,31.291 r337.5 top value=0R (schematic designator R27)
R37 "0R/0603" R0603-0.40-WW 15.924,32.695 r247.5 top value=0R (schematic designator R28)
R38 "270R/0603" R0603-0.40-WW -2.3,35.7 r270 top value=270R (schematic designator R26)
R39 "0R/0603" R0603-0.40-WW 0.8,34.2 r0 top value=0R (schematic designator R27)
R40 "0R/0603" R0603-0.40-WW 2.2,36.3 r270 top value=0R (schematic designator R28)
R41 "270R/0603" R0603-0.40-WW -15.787,32.102 r292.5 top value=270R (schematic designator R26)
R42 "0R/0603" R0603-0.40-WW -12.349,31.903 r22.5 top value=0R (schematic designator R27)
R43 "0R/0603" R0603-0.40-WW -11.859,34.379 r292.5 top value=0R (schematic designator R28)
R44 "270R/0603" R0603-0.40-WW -26.87,23.617 r315 top value=270R (schematic designator R26)
R45 "0R/0603" R0603-0.40-WW -23.617,24.749 r45 top value=0R (schematic designator R27)
R46 "0R/0603" R0603-0.40-WW -24.112,27.224 r315 top value=0R (schematic designator R28)
R47 "270R/0603" R0603-0.40-WW -33.863,11.537 r337.5 top value=270R (schematic designator R26)
R48 "0R/0603" R0603-0.40-WW -31.291,13.827 r67.5 top value=0R (schematic designator R27)
R49 "0R/0603" R0603-0.40-WW -32.695,15.924 r337.5 top value=0R (schematic designator R28)
R50 "270R/0603" R0603-0.40-WW -35.7,-2.3 r0 top value=270R (schematic designator R26)
R51 "0R/0603" R0603-0.40-WW -34.2,0.8 r90 top value=0R (schematic designator R27)
R52 "0R/0603" R0603-0.40-WW -36.3,2.2 r0 top value=0R (schematic designator R28)
R53 "270R/0603" R0603-0.40-WW -32.102,-15.787 r22.5 top value=270R (schematic designator R26)
R54 "0R/0603" R0603-0.40-WW -31.903,-12.349 r112.5 top value=0R (schematic designator R27)
R55 "0R/0603" R0603-0.40-WW -34.379,-11.859 r22.5 top value=0R (schematic designator R28)
R56 "270R/0603" R0603-0.40-WW -23.617,-26.87 r45 top value=270R (schematic designator R26)
R57 "0R/0603" R0603-0.40-WW -24.749,-23.617 r135 top value=0R (schematic designator R27)
R58 "0R/0603" R0603-0.40-WW -27.224,-24.112 r45 top value=0R (schematic designator R28)
R59 "270R/0603" R0603-0.40-WW -11.537,-33.863 r67.5 top value=270R (schematic designator R26)
R60 "0R/0603" R0603-0.40-WW -13.827,-31.291 r157.5 top value=0R (schematic designator R27)
R61 "0R/0603" R0603-0.40-WW -15.924,-32.695 r67.5 top value=0R (schematic designator R28)
R62 "270R/0603" R0603-0.40-WW 2.3,-35.7 r90 top value=270R (schematic designator R26)
R63 "0R/0603" R0603-0.40-WW -0.8,-34.2 r180 top value=0R (schematic designator R27)
R64 "0R/0603" R0603-0.40-WW -2.2,-36.3 r90 top value=0R (schematic designator R28)
R65 "270R/0603" R0603-0.40-WW 15.787,-32.102 r112.5 top value=270R (schematic designator R26)
R66 "0R/0603" R0603-0.40-WW 12.349,-31.903 r202.5 top value=0R (schematic designator R27)
R67 "0R/0603" R0603-0.40-WW 11.859,-34.379 r112.5 top value=0R (schematic designator R28)
R68 "270R/0603" R0603-0.40-WW 21.24,-15.611 r240 bottom value=270R (schematic designator R26)
R69 "0R/0603" R0603-0.40-WW 18.997,-17.896 r240 bottom value=0R (schematic designator R27)
R70 "0R/0603" R0603-0.40-WW 17.597,-20.321 r60 bottom value=0R (schematic designator R28)
R71 "270R/0603" R0603-0.40-WW 24.418,-6.707 r330 bottom value=270R (schematic designator R26)
R72 "0R/0603" R0603-0.40-WW 23.368,-8.526 r150 bottom value=0R (schematic designator R27)
R73 "0R/0603" R0603-0.40-WW 22.668,-9.739 r150 bottom value=0R (schematic designator R28)
R74 "270R/0603" R0603-0.40-WW 19.799,23.052 r45 bottom value=270R (schematic designator R26)
R75 "0R/0603" R0603-0.40-WW 23.052,21.92 r315 bottom value=0R (schematic designator R27)
R76 "0R/0603" R0603-0.40-WW 22.557,19.445 r45 bottom value=0R (schematic designator R28)
R77 "270R/0603" R0603-0.40-WW -23.052,19.799 r135 bottom value=270R (schematic designator R26)
R78 "0R/0603" R0603-0.40-WW -21.92,23.052 r45 bottom value=0R (schematic designator R27)
R79 "0R/0603" R0603-0.40-WW -19.445,22.557 r135 bottom value=0R (schematic designator R28)
R80 "270R/0603" R0603-0.40-WW -19.799,-23.052 r225 bottom value=270R (schematic designator R26)
R81 "0R/0603" R0603-0.40-WW -23.052,-21.92 r135 bottom value=0R (schematic designator R27)
R82 "0R/0603" R0603-0.40-WW -22.557,-19.445 r225 bottom value=0R (schematic designator R28)
R83 "270R/0603" R0603-0.40-WW 17.151,-25.085 r299.15 bottom value=270R (schematic designator R29)
R84 "1R/0805" R0805-0.50-WW -18.4,5.8 r270 top value=1R (schematic designator R30)
R85 "1R/0805" R0805-0.50-WW -16.8,5.8 r270 top value=1R (schematic designator R31)
R86 "270R/0603" R0603-0.40-WW -9.5,20.3 r0 top value=270R (schematic designator R32)
R87 "270R/0603" R0603-0.40-WW -12.4,19.9 r180 top value=270R (schematic designator R33)
R88 "4K7/0603" R0603-0.40-WW -15.3,5.5 r90 top value=4K7 (schematic designator R34)
R89 "10K/0603/NTC/3380K" R0603-0.40-WW -12.4,0 r270 top value=10K (schematic designator R35)
R90 "100K/0603" R0603-0.40-WW -14.9,8.9 r90 top value=100K (schematic designator R36)
R91 "1K5/0603" R0603-0.40-WW -13.9,5.5 r270 top value=1K5 (schematic designator R37)
R92 "1K5/0603" R0603-0.40-WW -11,-11.5 r0 top value=1K5 (schematic designator R38)
R93 "100K/0603" R0603-0.40-WW 13.1,22.4 r0 top value=100K (schematic designator R39)
R94 "100K/0603" R0603-0.40-WW 9.9,13.7 r180 top value=100K (schematic designator R40)
R95 "100K/0603" R0603-0.40-WW -3.9,33.8 r0 top value=100K (schematic designator R41)
R96 "1K/0603" R0603-0.40-WW -4.5,35.9 r281.25 top value=1K (schematic designator R42)
R97 "13K/0603" R0603-0.40-WW 15.2,23.1 r90 top value=13K (schematic designator R43)
R98 "22K/0603" R0603-0.40-WW 9.2,16.2 r90 top value=22K (schematic designator R44)
R99 "22K/0603" R0603-0.40-WW -15.1,29.8 r180 top value=22K (schematic designator R45)
R100 "100K/0603" R0603-0.40-WW -7.7,31.3 r90 top value=100K (schematic designator R46)
R101 "22K/0603" R0603-0.40-WW -1.8,32.2 r0 top value=22K (schematic designator R47)
R102 "100K/0603" R0603-0.40-WW 5.3,32.7 r180 top value=100K (schematic designator R48)
R103 "100K/0603" R0603-0.40-WW 28,15 r90 top value=100K (schematic designator R49)
R104 "1K5/0603" R0603-0.40-WW 16.6,23.8 r270 top value=1K5 (schematic designator R50)
R105 "100K/0603" R0603-0.40-WW 8.2,35.6 r270 top value=100K (schematic designator R51)
R106 "100K/0603" R0603-0.40-WW -1.8,30.8 r0 top value=100K (schematic designator R52)
R107 "22K/0603" R0603-0.40-WW 8.7,33.5 r0 top value=22K (schematic designator R53)
R108 "100K/0603" R0603-0.40-WW -9.2,22.4 r90 top value=100K (schematic designator R54)
R109 "10M/0603" R0603-0.40-WW -9.2,25.2 r90 top value=10M (schematic designator R55)
R110 "270R/0603" R0603-0.40-WW 22.3,16.4 r0 top value=270R (schematic designator R56)
R111 "100K/0603" R0603-0.40-WW 18.6,16.2 r270 top value=100K (schematic designator R57)
TP1 "TP_THD_1.5/0.8" TP_THD_1.5/0.8 -18,-18 r180 bottom
TP2 "TP_THD_1.5/0.8" TP_THD_1.5/0.8 10,-24 r180 bottom
TP3 "TP_THD_1.5/0.8" TP_THD_1.5/0.8 10,-18 r180 bottom
TP4 "TP_THD_1.5/0.8" TP_THD_1.5/0.8 26,4 r180 bottom
TP5 "TP_THD_1.5/0.8" TP_THD_1.5/0.8 30,20 r180 bottom
TP6 "TP_THD_1.5/0.8" TP_THD_1.5/0.8 20,-30 r180 bottom
TP7 "TP_THD_1.5/0.8" TP_THD_1.5/0.8 15,-21 r180 bottom
TP8 "TP_THD_1.5/0.8" TP_THD_1.5/0.8 21,9 r180 bottom
TP9 "TP_THD_1.5/0.8" TP_THD_1.5/0.8 13,8 r180 bottom
TP10 "TP_THD_1.5/0.8" TP_THD_1.5/0.8 -20,-11 r180 bottom
TP11 "TP_THD_1.5/0.8" TP_THD_1.5/0.8 -11,-19 r180 bottom
TP12 "TP_THD_1.5/0.8" TP_THD_1.5/0.8 -20,-15 r180 bottom
TP13 "TP_THD_1.5/0.8" TP_THD_1.5/0.8 -21,-4 r178.21 bottom
TP14 "TP_THD_1.5/0.8" TP_THD_1.5/0.8 -15,-1 r180 bottom
TP15 "TP_THD_1.5/0.8" TP_THD_1.5/0.8 31,3 r180 bottom
TP16 "TP_THD_1.5/0.8" TP_THD_1.5/0.8 -17,27 r180 bottom
TP17 "TP_THD_1.5/0.8" TP_THD_1.5/0.8 -17,-27 r180 bottom
TP18 "TP_THD_1.5/0.8" TP_THD_1.5/0.8 6,31 r180 bottom
TP19 "TP_THD_1.5/0.8" TP_THD_1.5/0.8 -6,-24 r180 bottom
TP20 "TP_THD_1.5/0.8" TP_THD_1.5/0.8 -20,30 r225 bottom
TP21 "TP_THD_1.5/0.8" TP_THD_1.5/0.8 -10,-9 r225 bottom
TP22 "TP_THD_1.5/0.8" TP_THD_1.5/0.8 -36,7 r180 bottom
TP23 "TP_THD_1.5/0.8" TP_THD_1.5/0.8 26,16 r180 bottom
TP24 "TP_THD_1.5/0.8" TP_THD_1.5/0.8 29,12 r191.98 bottom
U1 "ZD24C02B" SOP127P600X155-8-SW 20.9,5.1 r270 top
U2 "SN74LVC1G3157" SOT65P210X95-6-SE 14.3,2.6 r180 top
U3 "XL555" SOP127P600X155-8-SW -23,11.5 r0 top
U4 "AIP74HC00" SOP127P600X155-14-SW -26,-1 r270 top
U5 "74LVC1G157" SOT65P210X95-6-SE -23.4,5.7 r180 top
U6 "XL555" SOP127P600X155-8-SW -16,-9 r0 top
U7 "CD4040BC" SOP127P600X155-16-SW -26,-11 r270 top
U8 "WS2813B-V5" LEDM5050X165-6-SE#1 36,0 r90 bottom
U9 "WS2813B-V5" LEDM5050X165-6-SE#1 33.26,13.777 r112.5 bottom (schematic designator U8)
U10 "WS2813B-V5" LEDM5050X165-6-SE#1 25.456,25.456 r135 bottom (schematic designator U8)
U11 "WS2813B-V5" LEDM5050X165-6-SE#1 13.777,33.26 r157.5 bottom (schematic designator U8)
U12 "WS2813B-V5" LEDM5050X165-6-SE#1 0,36 r180 bottom (schematic designator U8)
U13 "WS2813B-V5" LEDM5050X165-6-SE#1 -13.777,33.26 r202.5 bottom (schematic designator U8)
U14 "WS2813B-V5" LEDM5050X165-6-SE#1 -25.456,25.456 r225 bottom (schematic designator U8)
U15 "WS2813B-V5" LEDM5050X165-6-SE#1 -33.26,13.777 r247.5 bottom (schematic designator U8)
U16 "WS2813B-V5" LEDM5050X165-6-SE#1 -36,0 r270 bottom (schematic designator U8)
U17 "WS2813B-V5" LEDM5050X165-6-SE#1 -33.26,-13.777 r292.5 bottom (schematic designator U8)
U18 "WS2813B-V5" LEDM5050X165-6-SE#1 -25.456,-25.456 r315 bottom (schematic designator U8)
U19 "WS2813B-V5" LEDM5050X165-6-SE#1 -13.777,-33.26 r337.5 bottom (schematic designator U8)
U20 "WS2813B-V5" LEDM5050X165-6-SE#1 0,-36 r0 bottom (schematic designator U8)
U21 "WS2813B-V5" LEDM5050X165-6-SE#1 13.777,-33.26 r22.5 bottom (schematic designator U8)
U22 "WS2813B-V5" LEDM5050X165-6-SE#1 21.215,-21.255 r60 bottom (schematic designator U8)
U23 "WS2813B-V5" LEDM5050X165-6-SE#1 27.015,-11.209 r60 bottom (schematic designator U8)
U24 "WS2813B-V5" LEDM5050X165-6-SE#2 21.213,21.213 r135 top (schematic designator U8)
U25 "WS2813B-V5" LEDM5050X165-6-SE#2 -21.213,21.213 r225 top (schematic designator U8)
U26 "WS2813B-V5" LEDM5050X165-6-SE#2 -21.213,-21.213 r315 top (schematic designator U8)
U27 "WS2813B-V5" LEDM5050X165-6-SE#2 15,-25.981 r30.01 top (schematic designator U9)
U28 "TP4056-MS" SOP127P600X155-9-TH330x240-NW -11.5,11.5 r90 top (schematic designator U10)
U29 "DW01A" SOT2395P280X125-6-SW -11.5,-14.5 r180 top (schematic designator U11)
U30 "TPS61023" SOT50P160X60-6-SE 14,25.5 r0 top (schematic designator U12)
U31 "ZD8028C" SOT2395P280X125-5-SW 10,19.5 r0 top (schematic designator U13)
U32 "MT8691AT" SOT2395P280X125-3-SE#2 -7.121,35.799 r281.25 top (schematic designator U14)
U33 "MT8691AT" SOT2395P280X125-3-SE#3 -7.121,35.799 r281.25 bottom (schematic designator U15)
? "Comment" JLC-ORDER 0,-32 r0 top

## Footprints (in the part's own frame and the unit in brackets; to place one, negate y for a bottom-side part, rotate by r counter-clockwise, add the part's x,y. Pads: shape width x height; smd on the part's side, far side on the other; paste and mask are expansions set on the pad)
BAT-21700-NC [mm] "Hole for 21700 with two solder Pads for FSCH nightcone project"
  rrect10% 12x10 smd paste-2539.97: 1(20,0)
  rrect10% 12x10 smd far side paste-2539.97: 2(-20,0)
  round 0 hole 23 unplated: M15(0,0)
  body extent -24,-10.5 24,10.5, height 40
CAP0603_C0G [mm]
  rrect20% 0.95x0.95 smd: 1(-0.725,0) 2(0.725,0)
  silkscreen extent -0.3,-0.7 0.3,0.7, body extent -0.8,-0.41 0.8,0.41, height 0.57
CAP0603_X7R [mm]
  rrect20% 0.95x0.95 smd: 1(-0.725,0) 2(0.725,0)
  silkscreen extent -0.3,-0.7 0.3,0.7, body extent -0.8,-0.41 0.8,0.41, height 0.57
CAP0805_X7R [mm] "Chip Capacitor 0805mil / 2012mm"
  rrect10% 1.2x1.2 smd: 1(-0.9,0) 2(0.9,0)
  silkscreen extent -0.5,-0.8 0.5,0.8, body extent -1,-0.51 1,0.51, height 0.72
DIOM5226X230 [mm] "DO-214AC"
  rrect50% 2.3x1.8 smd: 1(-2.1,0)
  rrect10% 2.3x1.8 smd: 2(2.1,0)
  silkscreen extent -3.5,-0.7 -3.5,0.7, body extent -2.6,-1.4 2.6,1.4, height 2.29
DIOM5436X265 [mm] "DO-214AA"
  rrect50% 2.3x2.3 smd: 1(-2.1,0)
  rrect10% 2.3x2.3 smd: 2(2.1,0)
  silkscreen extent -3.5,-1.2 -3.5,1.2, body extent -2.7,-1.8 2.7,1.8, height 2.65
ESP-12F [mm]
  rrect50% 1x2.5 smd: 1(2.5,-7.6) 2(4.5,-7.6) 3(6.5,-7.6) 4(8.5,-7.6) 5(10.5,-7.6) 6(12.5,-7.6) 7(14.5,-7.6) 8(16.5,-7.6) 15(16.5,7.6) 16(14.5,7.6) 17(12.5,7.6) 18(10.5,7.6) 19(8.5,7.6) 20(6.5,7.6) 21(4.5,7.6) 22(2.5,7.6)
  rrect50% 1.8x1 smd: 9(18,-5) 10(18,-3) 11(18,-1) 12(18,1) 13(18,3) 14(18,5)
  Keep-Out Layer region: -16,13 -1,13 -0.617,12.924 -0.293,12.707 -0.076,12.383 0,12 0,12 0,-12 -0.076,-12.383 -0.293,-12.707 -0.617,-12.924 -1,-13 -1,-13 -16,-13
  body extent -6,-8 18,8, height 3.1
FSCH-LOGO-10MM [mm]
  silkscreen extent 0,0 15.7,9.99, body extent 0,0 15.7,9.99, height 0.01
FSCH-LOGO-20MM [mm]
  silkscreen extent 0,0 31.48,20.02, body extent 0,0 31.48,20.02, height 0.01
Fuse1206-0.55-WW [mm]
  rrect20% 1.9x1.8 smd: 1(-1.45,0) 2(1.45,0)
  silkscreen extent -0.6,-1.1 0.6,1.1, body extent -1.6,-0.8 1.6,0.8, height 0.62
INDM2016X10 [mm]
  rrect20% 0.9x1.6 smd: 1(-0.9,0) 2(0.9,0)
  body extent -1,-0.8 1,0.8, height 1
INDM2520X10 [mm]
  rrect20% 1x2 smd: 1(-1.1,0) 2(1.1,0)
  body extent -1.25,-1 1.26,1, height 1
JLC-ORDER [mm] "Placement of JLCPCB order number"
LED0805_GREEN [mm]
  rrect20% 1x1.3 smd: 1(-0.9,0) 2(0.9,0)
  silkscreen extent -1.6,-0.8 0.5,0.8, body extent -1,-0.6 1,0.6, height 0.8
LED0805_RED [mm]
  rrect20% 1x1.3 smd: 1(-0.9,0) 2(0.9,0)
  silkscreen extent -1.6,-0.8 0.5,0.8, body extent -1,-0.6 1,0.6, height 0.8
LEDM5050X165-6-SE#1 [mm] "WS2813"
  rrect20% 1.7x1 smd: 1(2.35,-1.6) 2(2.35,0) 3(2.35,1.6) 4(-2.35,1.6) 5(-2.35,0) 6(-2.35,-1.6)
  round 0.4 on Bottom Overlay: 1(2.5,-2.7)
  body extent -2.7,-2.5 2.7,2.5, height 1.65
LEDM5050X165-6-SE#2 [mm] "WS2813"
  rrect20% 1.7x1 smd: 1(2.35,-1.6) 2(2.35,0) 3(2.35,1.6) 4(-2.35,1.6) 5(-2.35,0) 6(-2.35,-1.6)
  round 0.4 on Top Overlay: 1(2.5,-2.7)
  body extent -2.7,-2.5 2.7,2.5, height 1.65
MECH_SMTSO3020CTJ [mm] "SMTSO M3x0.5, 2mm Solder Nut"
  round 6.2 / inner round 5.2 / far side round 5.2 hole 4.22: 1(0,0)
  body extent -2.77,-2.78 2.77,2.78, height 2
MOUSE-R39-CLEAR [mm] "Mouse-bites on a radius of 39mm / Holes moved outside to avoid collisions with tracks on PCB"
  round 0 hole 0.6 unplated: 0(-2.498,-0.221) 0(-1.5,-0.271) 0(-0.5,-0.297) 0(0.5,-0.297) 0(1.5,-0.271) 0(2.498,-0.221)
PCB-NAME [mm]
R0603-0.40-WW [mm]
  rrect20% 0.95x0.95 smd: 1(-0.725,0) 2(0.725,0)
  silkscreen extent -0.3,-0.7 0.3,0.7, body extent -0.8,-0.4 0.8,0.4, height 0.3
R0805-0.50-WW [mm]
  rrect20% 1.2x1.2 smd: 1(-0.9,0) 2(0.9,0)
  silkscreen extent -0.5,-0.8 0.5,0.8, body extent -1,-0.5 1,0.5, height 0.37
SOD2513X100 [mm] "SOD-323"
  rrect50% 0.7x0.7 smd: 1(-1.075,0)
  rrect10% 0.7x0.7 smd: 2(1.075,0)
  silkscreen extent -1.63,-0.3 -1.63,0.3, body extent -1.25,-0.65 1.25,0.65, height 1
Solder_Jumper_2pin_0.3mm [mil] "Solder jumper with two pins with a spacing of 0.3mm"
  round 1 smd paste-99999: 1(-25.59,0) 2(25.59,0)
  Top Layer region: -5.91,39.37 -20.97,36.37 -33.74,27.84 -42.28,15.07 -45.28,0 -45.28,0 -42.28,-15.07 -33.74,-27.84 -20.97,-36.37 -5.91,-39.37 -5.91,-39.37
  Top Layer region: 5.91,-39.37 20.97,-36.37 33.74,-27.84 42.28,-15.07 45.28,0 45.28,0 42.28,15.07 33.74,27.84 20.97,36.37 5.91,39.37 5.91,39.37
SOP065P650X110-8-NW [mm] "TSSOP-8 / P-TSSOP-8-800"
  rrect25% 1.4x0.45 smd: 1(-2.925,0.975) 2(-2.925,0.325) 3(-2.925,-0.325) 4(-2.925,-0.975) 5(2.925,-0.975) 6(2.925,-0.325) 7(2.925,0.325) 8(2.925,0.975)
  round 0.4 on Top Overlay: 1(-2.65,1.65)
  body extent -3.27,-1.48 3.27,1.48, height 1.1
SOP127P600X155-8-SW [mm] "PHDSO-G8-I127, JEDEC MS-012AA, SOIC8"
  round 0.4 on Top Overlay: 1(-2.7,-2.5)
  rrect25% 0.61x1.91 smd: 1(-1.905,-2.78) 2(-0.635,-2.78) 3(0.635,-2.78) 4(1.905,-2.78) 5(1.905,2.78) 6(0.635,2.78) 7(-0.635,2.78) 8(-1.905,2.78)
  body extent -2.4,-3 2.4,3, height 1.45
SOP127P600X155-9-TH330x240-NW [mm] "PHDSO-G8-I127, JEDEC MS-012AA, SOIC8 with Thermal Pad"
  rrect25% 1.91x0.61 smd: 1(-2.78,1.905) 2(-2.78,0.635) 3(-2.78,-0.635) 4(-2.78,-1.905) 5(2.78,-1.905) 6(2.78,-0.635) 7(2.78,0.635) 8(2.78,1.905)
  round 0.4 on Top Overlay: 1(-2.5,2.7)
  rrect25% 2.4x3.3 smd: EP(0,0)
  body extent -3,-2.45 3,2.45, height 1.7
SOP127P600X155-14-SW [mm] "PHDSO-G8-I127, JEDEC MS-012AA, SOIC8"
  round 0.4 on Top Overlay: 1(-4.605,-2.5)
  rrect25% 0.61x1.91 smd: 1(-3.81,-2.78) 2(-2.54,-2.78) 3(-1.27,-2.78) 4(0,-2.78) 5(1.27,-2.78) 6(2.54,-2.78) 7(3.81,-2.78) 8(3.81,2.78) 9(2.54,2.78) 10(1.27,2.78) 11(0,2.78) 12(-1.27,2.78) 13(-2.54,2.78) 14(-3.81,2.78)
  body extent -4.31,-3 4.31,3, height 1.6
SOP127P600X155-16-SW [mm] "PHDSO-G8-I127, JEDEC MS-012AA, SOIC8"
  round 0.4 on Top Overlay: 1(-5.24,-2.5)
  rrect25% 0.61x1.91 smd: 1(-4.445,-2.78) 2(-3.175,-2.78) 3(-1.905,-2.78) 4(-0.635,-2.78) 5(0.635,-2.78) 6(1.905,-2.78) 7(3.175,-2.78) 8(4.445,-2.78) 9(4.445,2.78) 10(3.175,2.78) 11(1.905,2.78) 12(0.635,2.78) 13(-0.635,2.78) 14(-1.905,2.78) 15(-3.175,2.78) 16(-4.445,2.78)
  body extent -4.94,-3 4.94,3, height 1.6
SOT50P160X60-6-SE [mm] "SOT563"
  round 0.2 on Top Overlay: 1(0.7,-0.9)
  rrect25% 0.67x0.3 smd: 1(0.74,-0.5) 2(0.74,0) 3(0.74,0.5) 4(-0.74,0.5) 5(-0.74,0) 6(-0.74,-0.5)
  body extent -0.8,-0.8 0.8,0.8, height 0.6
SOT65P210X95-6-SE [mm] "SOT-363"
  round 0.2 on Top Overlay: 1(0.9,-1.2)
  rrect50% 0.6x0.4 smd: 1(0.95,-0.65) 2(0.95,0) 3(0.95,0.65) 4(-0.95,0.65) 5(-0.95,0) 6(-0.95,-0.65)
  body extent -1.1,-1.1 1.1,1.1, height 1.11
SOT2395P280X125-3-SE#1 [mm] "SOT23-3, SC74"
  rrect25% 1x0.55 smd: 1(1.35,-0.95) 2(1.35,0.95) 3(-1.35,0)
  round 0.4 on Top Overlay: 1(1.6,-1.6)
  body extent -1.4,-1.45 1.4,1.45, height 1.26
SOT2395P280X125-3-SE#2 [mm] "SOT23-3, SC74"
  rrect25% 1x0.55 smd: 1(1.35,-0.95) 2(1.35,0.95) 3(-1.35,0)
  round 0.4 on Top Overlay: 1(1.926,-1.585)
  body extent -1.4,-1.45 1.4,1.45, height 1.26
SOT2395P280X125-3-SE#3 [mm] "SOT23-3, SC74"
  rrect25% 1x0.55 smd: 1(1.35,-0.95) 2(1.35,0.95) 3(-1.35,0)
  round 0.4 on Bottom Overlay: 1(1.6,-1.6)
  body extent -1.4,-1.45 1.4,1.45, height 1.26
SOT2395P280X125-5-SW [mm] "SOT23-5"
  round 0.4 on Top Overlay: 1(-1.6,-1.6)
  rrect25% 0.55x1 smd: 1(-0.95,-1.35) 2(0,-1.35) 3(0.95,-1.35) 4(0.95,1.35) 5(-0.95,1.35)
  body extent -1.45,-1.4 1.45,1.4, height 1.26
SOT2395P280X125-6-SW [mm] "SOT23-6"
  round 0.4 on Top Overlay: 1(-1.6,-1.6)
  rrect25% 0.55x1 smd: 1(-0.95,-1.35) 2(0,-1.35) 3(0.95,-1.35) 4(0.95,1.35) 5(-0.01,1.35) 6(-0.95,1.35)
  body extent -1.45,-1.4 1.45,1.4, height 1.26
TC2030-NL-2 [mil] "Tag-Connect TC2030-NL, 6 pin, no-legs, top and bottom"
  round 31 smd paste-99999: 1(-50,-25) 2(-50,25) 3(0,-25) 4(0,25) 5(50,-25) 6(50,25)
  round 31 smd far side paste-99999: 1(-50,25) 2(-50,-25) 3(0,25) 4(0,-25) 5(50,25) 6(50,-25)
  round 0 hole 39 unplated: M(-100,0) M(100,-40) M(100,40)
TP_THD_1.5/0.8 [mm] "Testpoint THD 1.5mm / 0.8mm"
  round 1.5 hole 0.8: 1(0,0)
  silkscreen extent -1,-1 1,1